# EAGLE board XRP_Controller-Panel (EAGLE 9.6.2), part 1 of 5
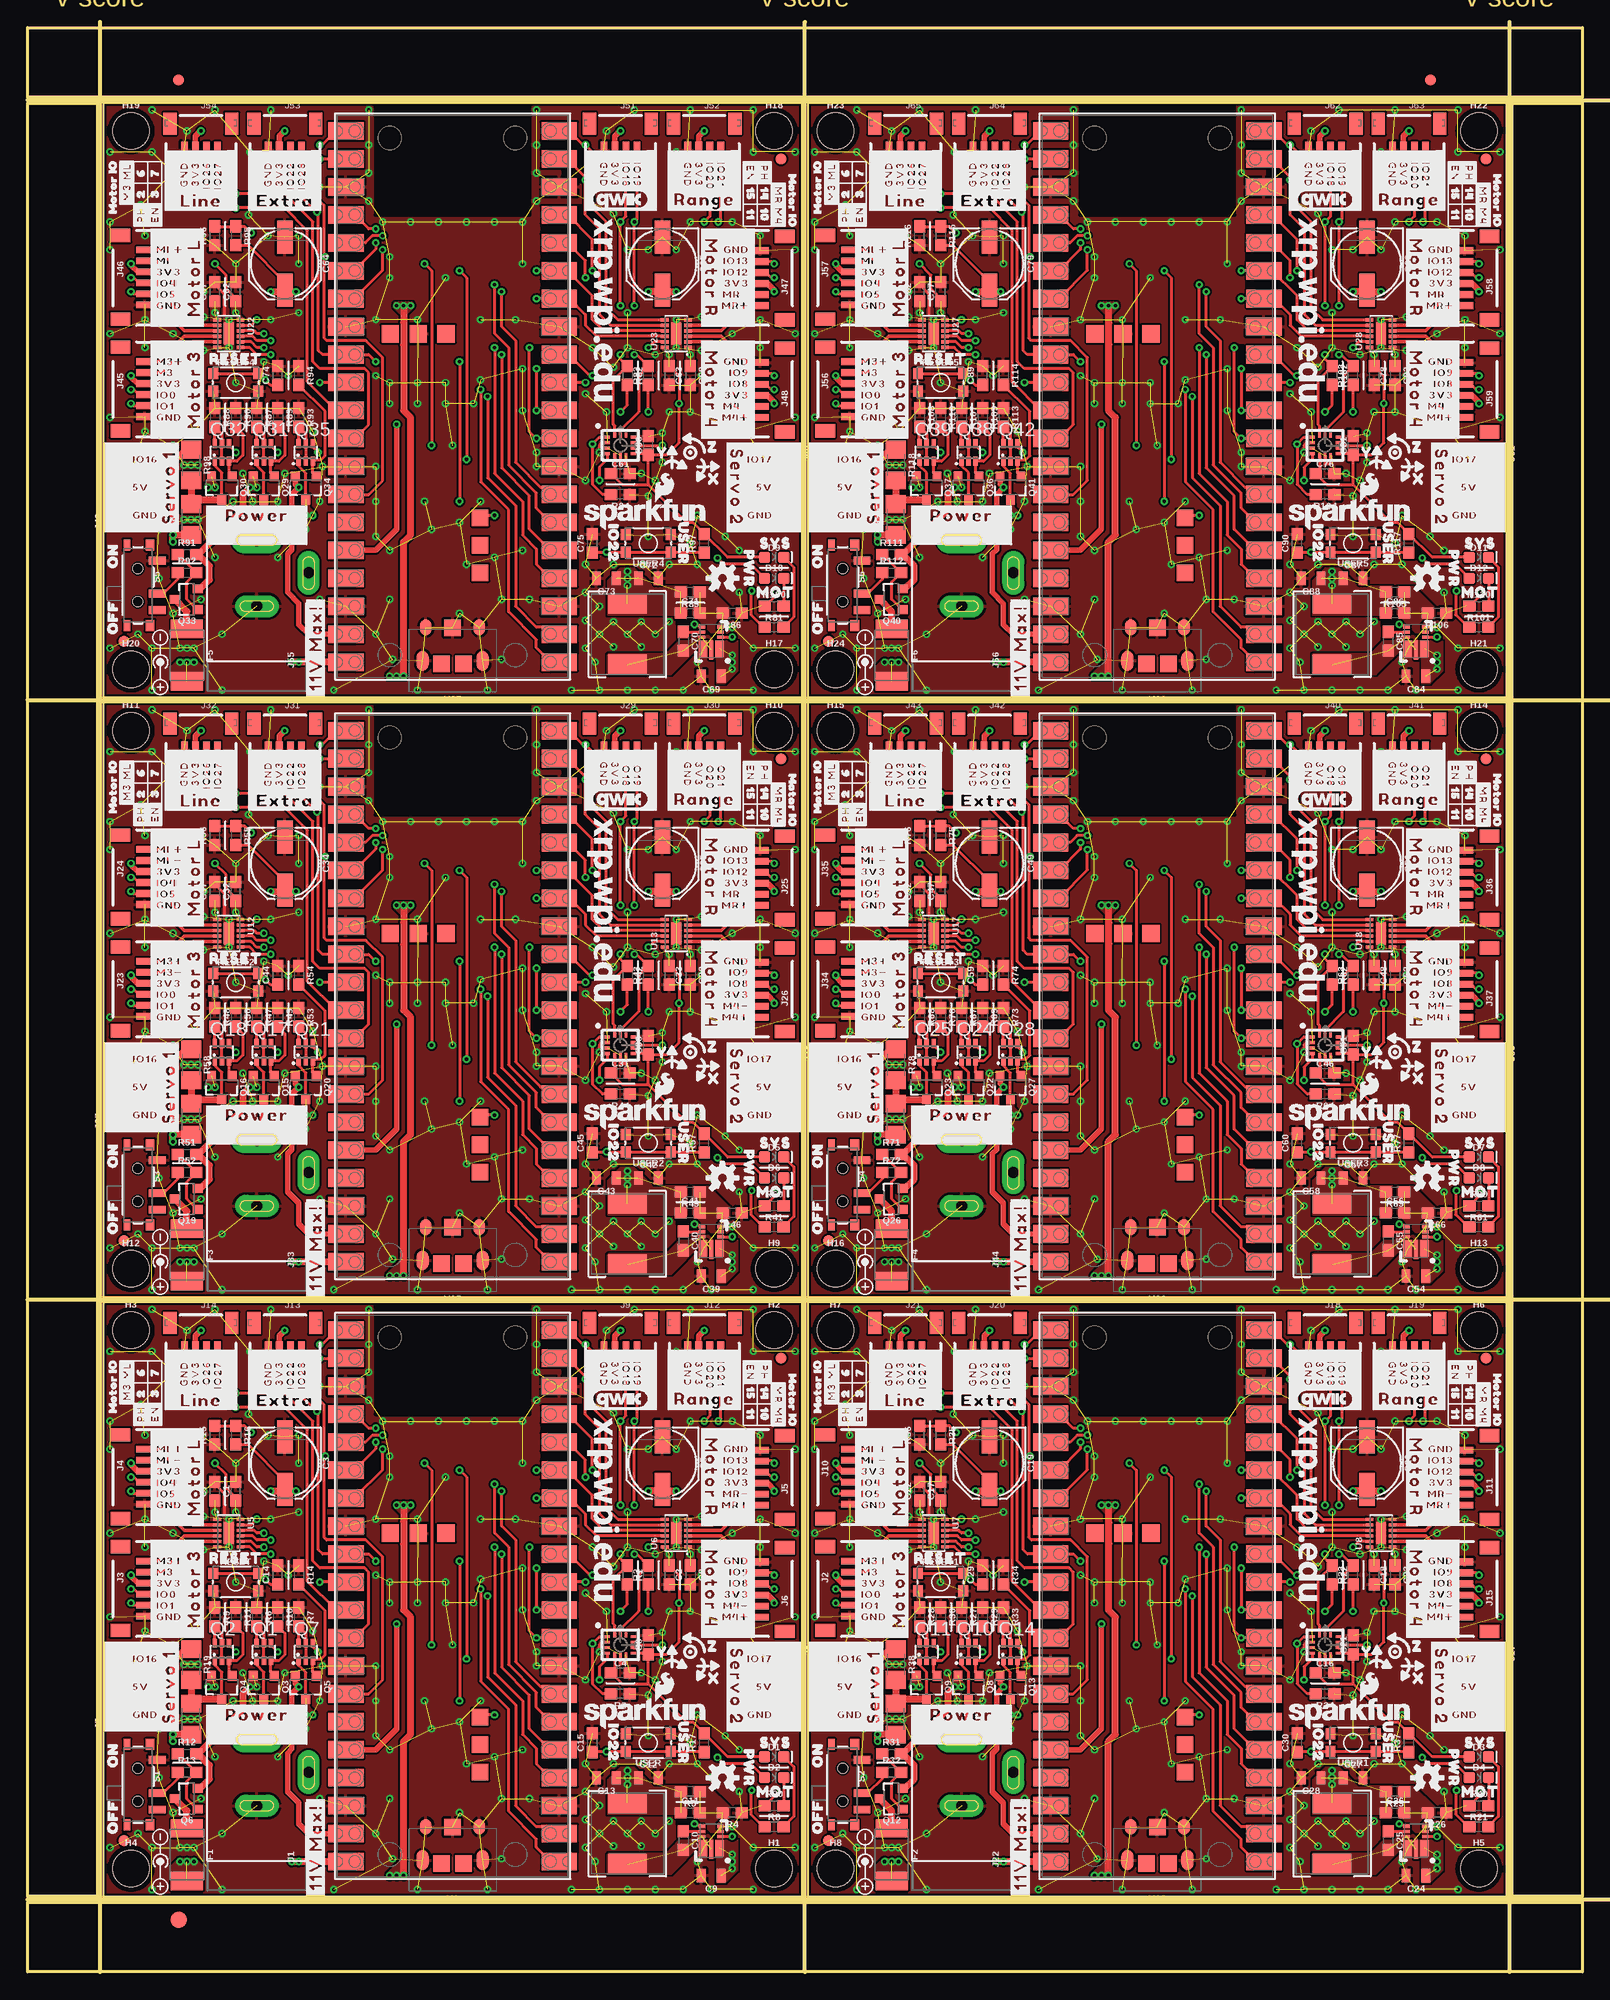
[diagram p0: board, top side]
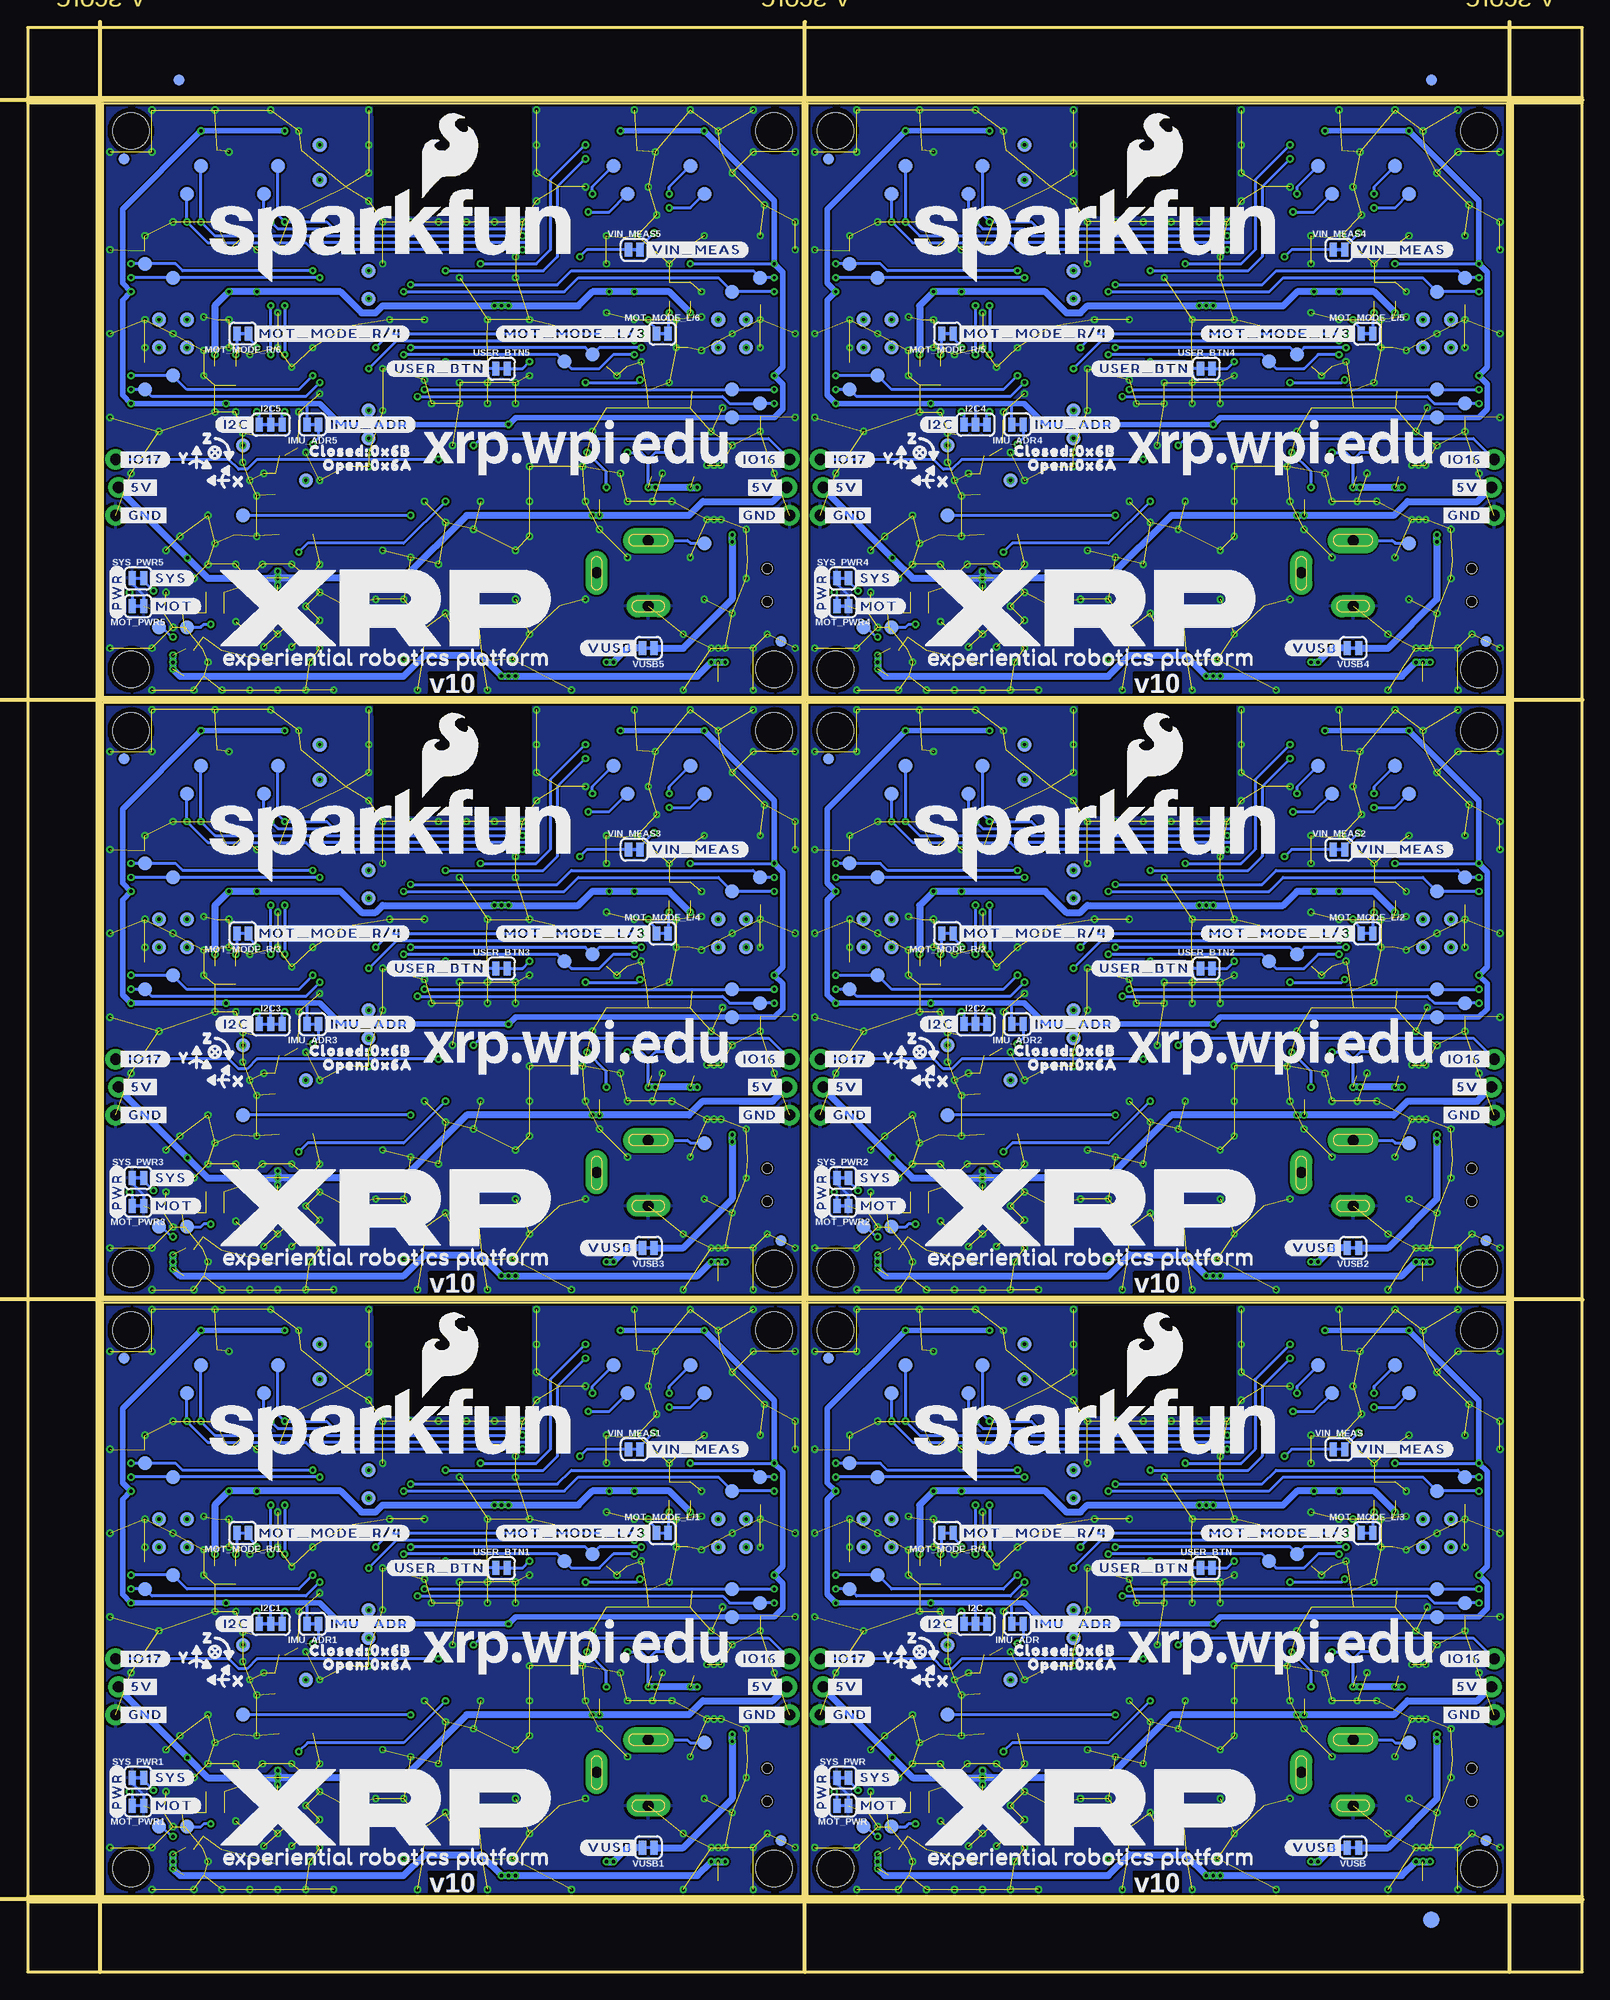
[diagram p1: board, bottom side, seen from below]

Size 141.22 x 176.66 mm. Coordinates in mm from the lower left corner, seen from the top.
Outline: 6.86,6.86 70.36,6.86 70.36,60.83 6.86,60.83 6.86,6.86
Outline: 70.87,6.86 134.37,6.86 134.37,60.83 70.87,60.83 70.87,6.86
Outline: 6.86,61.34 70.36,61.34 70.36,115.32 6.86,115.32 6.86,61.34
Outline: 70.87,61.34 134.37,61.34 134.37,115.32 70.87,115.32 70.87,61.34
Outline: 6.86,115.82 70.36,115.82 70.36,169.8 6.86,169.8 6.86,115.82
Outline: 70.87,115.82 134.37,115.82 134.37,169.8 70.87,169.8 70.87,115.82
Outline: 0,6.35 141.22,6.35 141.22,0 0,0 0,6.35
Outline: 134.87,169.8 141.22,169.8 141.22,6.86 134.87,6.86 134.87,169.8
Outline: 0,176.66 141.22,176.66 141.22,170.31 0,170.31 0,176.66
Outline: 0,169.8 6.35,169.8 6.35,6.86 0,6.86 0,169.8
Copper layers (1*16): Top 0.035mm / dielectric 1.5mm / Bottom 0.035mm
Design rules "XRP_Controller": minimum track width 7mil, minimum drill 0.3mm, track to track 7mil, track to pad 6mil, pad to pad 7mil, via to via 7mil, smd to smd 7mil, copper to edge 7mil, drill to drill 7mil, minimum pad ring 7mil, minimum via ring 7mil, stop-mask expansion 3mil, vias tented up to drill 25mil, thermal gap 10mil
tRestrict: area 31.6,59.7 to 45.6,60.8; area 49.7,18.7 to 49.9,19.2; area 49.7,21.2 to 49.9,21.7; area 49.7,23.7 to 49.9,24.3; area 49.7,11 to 49.9,11.6; area 49.7,31.4 to 49.9,31.9; area 49.7,33.9 to 49.9,34.4; area 46.7,44.1 to 47,44.6; area 46.7,46.6 to 47,47.1; area 46.7,49.1 to 47,49.7; area 46.7,56.8 to 47,57.3; area 50,51.3 to 50.3,51.4; 102 more areas
bRestrict: area 31.6,59.7 to 45.6,60.8; area 95.6,59.7 to 109.6,60.8; area 31.6,114.1 to 45.6,115.3; area 95.6,114.1 to 109.6,115.3; area 31.6,168.6 to 45.6,169.8; area 95.6,168.6 to 109.6,169.8
Milling: 7 lines

## Footprints (pad centres in the part's own frame; a part is rotated, then mirrored left to right if it is on the bottom)
0603 = smd 1.1 x 1: 1 -0.85,0; 2 0.85,0
PANASONIC_D = smd 3 x 1.4: + 2.4,0; - -2.4,0
0805 = smd 0.8 x 1.2: 1 -0.9,0; 2 0.9,0
LED-0603 = smd 1 x 1: A -0.877,0; C 0.877,0
FIDUCIAL-1X2 = smd 1 x 1: 1 0,0
FIDUCIAL-1.5X3 = smd 1.5 x 1.5: 1 0,0
1812 = smd 1.676 x 2.896: 1 -2.388,0; 2 2.388,0
STAND-OFF = hole 3.302: 0,0
SMT-JUMPER_3_2-NC_TRACE_SILK = smd 0.66 x 1.27: 1 -1.041,0; 2 0,0; 3 1.041,0
SMT-JUMPER_2_NC_TRACE_SILK = smd 0.66 x 1.27: 1 -0.521,0; 2 0.521,0
POWER_JACK_PTH_SLOT = drill 1 pad 2 long: GND 0,0; GNDBREAK -3.048,4.699 | drill 1 pad 2.3 long: PWR -5.969,0
JST-6-SMD-VERT-1.0MM = smd 0.6 x 1.55: 1 -2.54,1.27; 2 -1.54,1.27; 3 -0.54,1.27; 4 0.46,1.27; 5 1.46,1.27; 6 2.46,1.27 | smd 1.2 x 1.8: P$1 -3.84,-0.955; P$2 3.76,-0.955
1X03_LOCK_NO_SILK = drill 1.016 pad 1.88: 1 0,0.127; 2 2.54,-0.127; 3 5.08,0.127
JST04_1MM_VERT = smd 0.6 x 1.55: 1 -1.5,0.775; 2 -0.5,0.775; 3 0.5,0.775; 4 1.5,0.775 | smd 1.2 x 2: NC1 -2.8,3.2; NC2 2.8,3.2
07A7_6U8H = smd 1.85 x 3.5: P$1 -2.775,0; P$2 2.775,0
SOT363_PHILIPS = smd 0.4 x 0.8: 1 -0.65,-0.8; 2 0,-0.8; 3 0.65,-0.8; 4 0.65,0.8; 5 0,0.8; 6 -0.65,0.8
SOT23-3 = smd 0.8 x 0.9: 1 -0.95,-1; 2 0.95,-1; 3 0,1.1
1206 = smd 1.6 x 1.8: 1 -1.4,0; 2 1.4,0
TACTILE_SWITCH_SMD_4.6X2.8MM = smd 0.9 x 1: 1 -2.05,-0.8; 2 2.05,-0.8; 3 2.05,0.8; 4 -2.05,0.8
SWITCH_SPST_SMD_A = smd 0.7 x 1.5: 1 -2.25,-1.75; 2 -0.75,-1.75; 3 2.25,-1.75 | smd 1 x 0.6: GND1 -3.65,1; GND3 3.65,1 | smd 1 x 0.8: GND2 -3.65,-1.1; GND4 3.65,-1.1 | hole 0.9: -1.5,0; 1.5,0
PAD.03X.05 = smd 1.27 x 1.27: 1 0,0
RPI_PICO_W = smd 3.2 x 1.6: 1 -9.69,24.13; 2 -9.69,21.59; 3 -9.69,19.05; 4 -9.69,16.51; 5 -9.69,13.97; 6 -9.69,11.43; 7 -9.69,8.89; 8 -9.69,6.35; 9 -9.69,3.81; 10 -9.69,1.27; 11 -9.69,-1.27; 12 -9.69,-3.81; 13 -9.69,-6.35; 14 -9.69,-8.89; 15 -9.69,-11.43; 16 -9.69,-13.97; 17 -9.69,-16.51; 18 -9.69,-19.05; 19 -9.69,-21.59; 20 -9.69,-24.13; 21 9.69,-24.13; 22 9.69,-21.59; 23 9.69,-19.05; 24 9.69,-16.51; 25 9.69,-13.97; 26 9.69,-11.43; 27 9.69,-8.89; 28 9.69,-6.35; 29 9.69,-3.81; 30 9.69,-1.27; 31 9.69,1.27; 32 9.69,3.81; 33 9.69,6.35; 34 9.69,8.89; 35 9.69,11.43; 36 9.69,13.97; 37 9.69,16.51; 38 9.69,19.05; 39 9.69,21.59; 40 9.69,24.13 | smd 1.5 x 1.5: 41 0,21; 42 1,24.3; 43 -1,24.3; 44 -2.5,16; 45 -2.5,13.5; 46 -2.5,11 | smd 1.575 x 1.575: 47 0.584,-5.7; 48 3.124,-5.7; 49 5.664,-5.7 | smd 1.1 x 1.8: A -2.725,24; B 2.725,24 | smd 1.05 x 1.45: C -2.425,20.97; D 2.425,20.97
V-DFN3020-13 = smd 1.5 x 0.8: P$1 -0.675,-0.75; P$8 -0.675,0.75 | smd 0.3 x 0.6: P$2 0.375,-0.85; P$3 0.825,-0.85; P$4 1.275,-0.85; P$5 1.275,0.85; P$6 0.825,0.85; P$7 0.375,0.85 | smd 1.73 x 0.4: P$9 -0.79,0
LGA14L = smd 0.45 x 0.25: 1 -1.175,0.75; 2 -1.175,0.25; 3 -1.175,-0.25; 4 -1.175,-0.75; 8 1.175,-0.75; 9 1.175,-0.25; 10 1.175,0.25; 11 1.175,0.75 | smd 0.25 x 0.45: 5 -0.5,-0.925; 6 0,-0.925; 7 0.5,-0.925; 12 0.5,0.925; 13 0,0.925; 14 -0.5,0.925
WSON-12 = smd 0.3 x 0.7: 1 -1.25,-1.05; 2 -0.75,-1.05; 3 -0.25,-1.05; 4 0.25,-1.05; 5 0.75,-1.05; 6 1.25,-1.05; 7 1.25,1.05; 8 0.75,1.05; 9 0.25,1.05; 10 -0.25,1.05; 11 -0.75,1.05; 12 -1.25,1.05 | smd 2 x 0.9: PAD 0,0

## Placement (x,y rotation side)
C1  0.1uF  [0603]  18.92,43.69 90 top
C2  0.1uF  [0603]  58.29,36.07 270 top
C3  100uF  [PANASONIC_D]  23.37,46.23 270 top
C4  0.1uF  [0603]  53.85,27.18 0 top
C5  100uF  [PANASONIC_D]  57.66,46.23 270 top
C6  0.1uF  [0603]  56.39,29.72 90 top
C7  0.1uF  [0603]  17.02,43.69 90 top
C8  0.1uF  [0603]  60.2,36.07 270 top
C9  10uF  [0805]  62.1,8.76 180 top
C10  0.1uF  [0603]  59.56,11.94 270 top
C11  47pF  [0603]  60.2,14.48 0 top
C12  22uF  [0805]  56.39,17.65 0 top
C13  22uF  [0805]  52.58,17.65 180 top
C14  0.1uF  [0603]  22.73,36.07 90 top
C15  0.1uF  [0603]  51.31,20.83 90 top
C16  0.1uF  [0603]  117.86,27.18 0 top
C17  0.1uF  [0603]  82.93,43.69 90 top
C18  0.1uF  [0603]  122.3,36.07 270 top
C19  100uF  [PANASONIC_D]  87.38,46.23 270 top
C20  100uF  [PANASONIC_D]  121.67,46.23 270 top
C21  0.1uF  [0603]  120.4,29.72 90 top
C22  0.1uF  [0603]  81.03,43.69 90 top
C23  0.1uF  [0603]  124.21,36.07 270 top
C24  10uF  [0805]  126.11,8.76 180 top
C25  0.1uF  [0603]  123.57,11.94 270 top
C26  47pF  [0603]  124.21,14.48 0 top
C27  22uF  [0805]  120.4,17.65 0 top
C28  22uF  [0805]  116.59,17.65 180 top
C29  0.1uF  [0603]  86.74,36.07 90 top
C30  0.1uF  [0603]  115.32,20.83 90 top
C31  0.1uF  [0603]  53.85,81.66 0 top
C32  0.1uF  [0603]  18.92,98.17 90 top
C33  0.1uF  [0603]  58.29,90.55 270 top
C34  100uF  [PANASONIC_D]  23.37,100.71 270 top
C35  100uF  [PANASONIC_D]  57.66,100.71 270 top
C36  0.1uF  [0603]  56.39,84.2 90 top
C37  0.1uF  [0603]  17.02,98.17 90 top
C38  0.1uF  [0603]  60.2,90.55 270 top
C39  10uF  [0805]  62.1,63.25 180 top
C40  0.1uF  [0603]  59.56,66.42 270 top
C41  47pF  [0603]  60.2,68.96 0 top
C42  22uF  [0805]  56.39,72.14 0 top
C43  22uF  [0805]  52.58,72.14 180 top
C44  0.1uF  [0603]  22.73,90.55 90 top
C45  0.1uF  [0603]  51.31,75.31 90 top
C46  0.1uF  [0603]  117.86,81.66 0 top
C47  0.1uF  [0603]  82.93,98.17 90 top
C48  0.1uF  [0603]  122.3,90.55 270 top
C49  100uF  [PANASONIC_D]  87.38,100.71 270 top
C50  100uF  [PANASONIC_D]  121.67,100.71 270 top
C51  0.1uF  [0603]  120.4,84.2 90 top
C52  0.1uF  [0603]  81.03,98.17 90 top
C53  0.1uF  [0603]  124.21,90.55 270 top
C54  10uF  [0805]  126.11,63.25 180 top
C55  0.1uF  [0603]  123.57,66.42 270 top
C56  47pF  [0603]  124.21,68.96 0 top
C57  22uF  [0805]  120.4,72.14 0 top
C58  22uF  [0805]  116.59,72.14 180 top
C59  0.1uF  [0603]  86.74,90.55 90 top
C60  0.1uF  [0603]  115.32,75.31 90 top
C61  0.1uF  [0603]  53.85,136.14 0 top
C62  0.1uF  [0603]  18.92,152.65 90 top
C63  0.1uF  [0603]  58.29,145.03 270 top
C64  100uF  [PANASONIC_D]  23.37,155.19 270 top
C65  100uF  [PANASONIC_D]  57.66,155.19 270 top
C66  0.1uF  [0603]  56.39,138.68 90 top
C67  0.1uF  [0603]  17.02,152.65 90 top
C68  0.1uF  [0603]  60.2,145.03 270 top
C69  10uF  [0805]  62.1,117.73 180 top
C70  0.1uF  [0603]  59.56,120.9 270 top
C71  47pF  [0603]  60.2,123.44 0 top
C72  22uF  [0805]  56.39,126.62 0 top
C73  22uF  [0805]  52.58,126.62 180 top
C74  0.1uF  [0603]  22.73,145.03 90 top
C75  0.1uF  [0603]  51.31,129.79 90 top
C76  0.1uF  [0603]  117.86,136.14 0 top
C77  0.1uF  [0603]  82.93,152.65 90 top
C78  0.1uF  [0603]  122.3,145.03 270 top
C79  100uF  [PANASONIC_D]  87.38,155.19 270 top
C80  100uF  [PANASONIC_D]  121.67,155.19 270 top
C81  0.1uF  [0603]  120.4,138.68 90 top
C82  0.1uF  [0603]  81.03,152.65 90 top
C83  0.1uF  [0603]  124.21,145.03 270 top
C84  10uF  [0805]  126.11,117.73 180 top
C85  0.1uF  [0603]  123.57,120.9 270 top
C86  47pF  [0603]  124.21,123.44 0 top
C87  22uF  [0805]  120.4,126.62 0 top
C88  22uF  [0805]  116.59,126.62 180 top
C89  0.1uF  [0603]  86.74,145.03 90 top
C90  0.1uF  [0603]  115.32,129.79 90 top
D1  Red  [LED-0603]  67.82,19.56 0 top
D2  Red  [LED-0603]  67.82,17.65 0 top
D3  Red  [LED-0603]  131.83,19.56 0 top
D4  Red  [LED-0603]  131.83,17.65 0 top
D5  Red  [LED-0603]  67.82,74.04 0 top
D6  Red  [LED-0603]  67.82,72.14 0 top
D7  Red  [LED-0603]  131.83,74.04 0 top
D8  Red  [LED-0603]  131.83,72.14 0 top
D9  Red  [LED-0603]  67.82,128.52 0 top
D10  Red  [LED-0603]  67.82,126.62 0 top
D11  Red  [LED-0603]  131.83,128.52 0 top
D12  Red  [LED-0603]  131.83,126.62 0 top
E$1  [FIDUCIAL-1X2]  13.72,171.89 0 top
E$2  [FIDUCIAL-1X2]  13.72,171.89 0 bottom
E$3  [FIDUCIAL-1X2]  127.44,171.89 0 top
E$4  [FIDUCIAL-1X2]  127.44,171.89 0 bottom
E$5  [FIDUCIAL-1.5X3]  13.72,4.76 0 top
E$6  [FIDUCIAL-1.5X3]  13.72,4.76 0 bottom
F1  16V/2.5A(5A TRIP)  [1812]  14.48,10.67 270 top
F2  16V/2.5A(5A TRIP)  [1812]  78.49,10.67 270 top
F3  16V/2.5A(5A TRIP)  [1812]  14.48,65.15 270 top
F4  16V/2.5A(5A TRIP)  [1812]  78.49,65.15 270 top
F5  16V/2.5A(5A TRIP)  [1812]  14.48,119.63 270 top
F6  16V/2.5A(5A TRIP)  [1812]  78.49,119.63 270 top
FD1  FIDUCIAL1X2  [FIDUCIAL-1X2]  68.45,55.75 0 top
FD2  FIDUCIAL1X2  [FIDUCIAL-1X2]  68.45,55.75 0 bottom
FD3  FIDUCIAL1X2  [FIDUCIAL-1X2]  8.76,11.94 0 top
FD4  FIDUCIAL1X2  [FIDUCIAL-1X2]  8.76,11.94 0 bottom
FD5  FIDUCIAL1X2  [FIDUCIAL-1X2]  132.46,55.75 0 top
FD6  FIDUCIAL1X2  [FIDUCIAL-1X2]  132.46,55.75 0 bottom
FD7  FIDUCIAL1X2  [FIDUCIAL-1X2]  72.77,11.94 0 top
FD8  FIDUCIAL1X2  [FIDUCIAL-1X2]  72.77,11.94 0 bottom
FD9  FIDUCIAL1X2  [FIDUCIAL-1X2]  68.45,110.24 0 top
FD10  FIDUCIAL1X2  [FIDUCIAL-1X2]  68.45,110.24 0 bottom
FD11  FIDUCIAL1X2  [FIDUCIAL-1X2]  8.76,66.42 0 top
FD12  FIDUCIAL1X2  [FIDUCIAL-1X2]  8.76,66.42 0 bottom
FD13  FIDUCIAL1X2  [FIDUCIAL-1X2]  132.46,110.24 0 top
FD14  FIDUCIAL1X2  [FIDUCIAL-1X2]  132.46,110.24 0 bottom
FD15  FIDUCIAL1X2  [FIDUCIAL-1X2]  72.77,66.42 0 top
FD16  FIDUCIAL1X2  [FIDUCIAL-1X2]  72.77,66.42 0 bottom
FD17  FIDUCIAL1X2  [FIDUCIAL-1X2]  68.45,164.72 0 top
FD18  FIDUCIAL1X2  [FIDUCIAL-1X2]  68.45,164.72 0 bottom
FD19  FIDUCIAL1X2  [FIDUCIAL-1X2]  8.76,120.9 0 top
FD20  FIDUCIAL1X2  [FIDUCIAL-1X2]  8.76,120.9 0 bottom
FD21  FIDUCIAL1X2  [FIDUCIAL-1X2]  132.46,164.72 0 top
FD22  FIDUCIAL1X2  [FIDUCIAL-1X2]  132.46,164.72 0 bottom
FD23  FIDUCIAL1X2  [FIDUCIAL-1X2]  72.77,120.9 0 top
FD24  FIDUCIAL1X2  [FIDUCIAL-1X2]  72.77,120.9 0 bottom
H1  STAND-OFF  [STAND-OFF]  67.82,9.4 0 top
H2  STAND-OFF  [STAND-OFF]  67.82,58.29 0 top
H3  STAND-OFF  [STAND-OFF]  9.4,58.29 0 top
H4  STAND-OFF  [STAND-OFF]  9.4,9.4 0 top
H5  STAND-OFF  [STAND-OFF]  131.83,9.4 0 top
H6  STAND-OFF  [STAND-OFF]  131.83,58.29 0 top
H7  STAND-OFF  [STAND-OFF]  73.41,58.29 0 top
H8  STAND-OFF  [STAND-OFF]  73.41,9.4 0 top
H9  STAND-OFF  [STAND-OFF]  67.82,63.88 0 top
H10  STAND-OFF  [STAND-OFF]  67.82,112.78 0 top
H11  STAND-OFF  [STAND-OFF]  9.4,112.78 0 top
H12  STAND-OFF  [STAND-OFF]  9.4,63.88 0 top
H13  STAND-OFF  [STAND-OFF]  131.83,63.88 0 top
H14  STAND-OFF  [STAND-OFF]  131.83,112.78 0 top
H15  STAND-OFF  [STAND-OFF]  73.41,112.78 0 top
H16  STAND-OFF  [STAND-OFF]  73.41,63.88 0 top
H17  STAND-OFF  [STAND-OFF]  67.82,118.36 0 top
H18  STAND-OFF  [STAND-OFF]  67.82,167.26 0 top
H19  STAND-OFF  [STAND-OFF]  9.4,167.26 0 top
H20  STAND-OFF  [STAND-OFF]  9.4,118.36 0 top
H21  STAND-OFF  [STAND-OFF]  131.83,118.36 0 top
H22  STAND-OFF  [STAND-OFF]  131.83,167.26 0 top
H23  STAND-OFF  [STAND-OFF]  73.41,167.26 0 top
H24  STAND-OFF  [STAND-OFF]  73.41,118.36 0 top
I2C  JUMPER-SMT_3_2-NC_TRACE_SILK  [SMT-JUMPER_3_2-NC_TRACE_SILK]  55.12,31.62 0 bottom
I2C1  JUMPER-SMT_3_2-NC_TRACE_SILK  [SMT-JUMPER_3_2-NC_TRACE_SILK]  119.13,31.62 0 bottom
I2C2  JUMPER-SMT_3_2-NC_TRACE_SILK  [SMT-JUMPER_3_2-NC_TRACE_SILK]  55.12,86.11 0 bottom
I2C3  JUMPER-SMT_3_2-NC_TRACE_SILK  [SMT-JUMPER_3_2-NC_TRACE_SILK]  119.13,86.11 0 bottom
I2C4  JUMPER-SMT_3_2-NC_TRACE_SILK  [SMT-JUMPER_3_2-NC_TRACE_SILK]  55.12,140.59 0 bottom
I2C5  JUMPER-SMT_3_2-NC_TRACE_SILK  [SMT-JUMPER_3_2-NC_TRACE_SILK]  119.13,140.59 0 bottom
IMU_ADR  JUMPER-SMT_2_NC_TRACE_SILK  [SMT-JUMPER_2_NC_TRACE_SILK]  51.31,31.62 180 bottom
IMU_ADR1  JUMPER-SMT_2_NC_TRACE_SILK  [SMT-JUMPER_2_NC_TRACE_SILK]  115.32,31.62 180 bottom
IMU_ADR2  JUMPER-SMT_2_NC_TRACE_SILK  [SMT-JUMPER_2_NC_TRACE_SILK]  51.31,86.11 180 bottom
IMU_ADR3  JUMPER-SMT_2_NC_TRACE_SILK  [SMT-JUMPER_2_NC_TRACE_SILK]  115.32,86.11 180 bottom
IMU_ADR4  JUMPER-SMT_2_NC_TRACE_SILK  [SMT-JUMPER_2_NC_TRACE_SILK]  51.31,140.59 180 bottom
IMU_ADR5  JUMPER-SMT_2_NC_TRACE_SILK  [SMT-JUMPER_2_NC_TRACE_SILK]  115.32,140.59 180 bottom
J1  POWER_JACKPOWER_JACK_SLOT  [POWER_JACK_PTH_SLOT]  20.83,15.11 270 top
J2  JST_6_PIN_VERTICAL  [JST-6-SMD-VERT-1.0MM]  73.41,34.8 270 top
J3  JST_6_PIN_VERTICAL  [JST-6-SMD-VERT-1.0MM]  9.4,34.8 270 top
J4  JST_6_PIN_VERTICAL  [JST-6-SMD-VERT-1.0MM]  9.4,44.96 270 top
J5  JST_6_PIN_VERTICAL  [JST-6-SMD-VERT-1.0MM]  67.82,44.96 90 top
J6  JST_6_PIN_VERTICAL  [JST-6-SMD-VERT-1.0MM]  67.82,34.8 90 top
J7  [1X03_LOCK_NO_SILK]  8.13,23.37 90 top
J8  [1X03_LOCK_NO_SILK]  69.09,28.45 270 top
J9  Vertical Qwiic Connector  [JST04_1MM_VERT]  53.85,55.75 0 top
J10  JST_6_PIN_VERTICAL  [JST-6-SMD-VERT-1.0MM]  73.41,44.96 270 top
J11  JST_6_PIN_VERTICAL  [JST-6-SMD-VERT-1.0MM]  131.83,44.96 90 top
J12  Vertical Qwiic Connector  [JST04_1MM_VERT]  61.47,55.75 0 top
J13  Vertical Qwiic Connector  [JST04_1MM_VERT]  23.37,55.75 0 top
J14  Vertical Qwiic Connector  [JST04_1MM_VERT]  15.75,55.75 0 top
J15  JST_6_PIN_VERTICAL  [JST-6-SMD-VERT-1.0MM]  131.83,34.8 90 top
J16  [1X03_LOCK_NO_SILK]  72.14,23.37 90 top
J17  [1X03_LOCK_NO_SILK]  133.1,28.45 270 top
J18  Vertical Qwiic Connector  [JST04_1MM_VERT]  117.86,55.75 0 top
J19  Vertical Qwiic Connector  [JST04_1MM_VERT]  125.48,55.75 0 top
J20  Vertical Qwiic Connector  [JST04_1MM_VERT]  87.38,55.75 0 top
J21  Vertical Qwiic Connector  [JST04_1MM_VERT]  79.76,55.75 0 top
J22  POWER_JACKPOWER_JACK_SLOT  [POWER_JACK_PTH_SLOT]  84.84,15.11 270 top
J23  JST_6_PIN_VERTICAL  [JST-6-SMD-VERT-1.0MM]  9.4,89.28 270 top
J24  JST_6_PIN_VERTICAL  [JST-6-SMD-VERT-1.0MM]  9.4,99.44 270 top
J25  JST_6_PIN_VERTICAL  [JST-6-SMD-VERT-1.0MM]  67.82,99.44 90 top
J26  JST_6_PIN_VERTICAL  [JST-6-SMD-VERT-1.0MM]  67.82,89.28 90 top
J27  [1X03_LOCK_NO_SILK]  8.13,77.85 90 top
J28  [1X03_LOCK_NO_SILK]  69.09,82.93 270 top
J29  Vertical Qwiic Connector  [JST04_1MM_VERT]  53.85,110.24 0 top
J30  Vertical Qwiic Connector  [JST04_1MM_VERT]  61.47,110.24 0 top
J31  Vertical Qwiic Connector  [JST04_1MM_VERT]  23.37,110.24 0 top
J32  Vertical Qwiic Connector  [JST04_1MM_VERT]  15.75,110.24 0 top
J33  POWER_JACKPOWER_JACK_SLOT  [POWER_JACK_PTH_SLOT]  20.83,69.6 270 top
J34  JST_6_PIN_VERTICAL  [JST-6-SMD-VERT-1.0MM]  73.41,89.28 270 top
J35  JST_6_PIN_VERTICAL  [JST-6-SMD-VERT-1.0MM]  73.41,99.44 270 top
J36  JST_6_PIN_VERTICAL  [JST-6-SMD-VERT-1.0MM]  131.83,99.44 90 top
J37  JST_6_PIN_VERTICAL  [JST-6-SMD-VERT-1.0MM]  131.83,89.28 90 top
J38  [1X03_LOCK_NO_SILK]  72.14,77.85 90 top
J39  [1X03_LOCK_NO_SILK]  133.1,82.93 270 top
J40  Vertical Qwiic Connector  [JST04_1MM_VERT]  117.86,110.24 0 top
J41  Vertical Qwiic Connector  [JST04_1MM_VERT]  125.48,110.24 0 top
J42  Vertical Qwiic Connector  [JST04_1MM_VERT]  87.38,110.24 0 top
J43  Vertical Qwiic Connector  [JST04_1MM_VERT]  79.76,110.24 0 top
J44  POWER_JACKPOWER_JACK_SLOT  [POWER_JACK_PTH_SLOT]  84.84,69.6 270 top
J45  JST_6_PIN_VERTICAL  [JST-6-SMD-VERT-1.0MM]  9.4,143.76 270 top
J46  JST_6_PIN_VERTICAL  [JST-6-SMD-VERT-1.0MM]  9.4,153.92 270 top
J47  JST_6_PIN_VERTICAL  [JST-6-SMD-VERT-1.0MM]  67.82,153.92 90 top
J48  JST_6_PIN_VERTICAL  [JST-6-SMD-VERT-1.0MM]  67.82,143.76 90 top
J49  [1X03_LOCK_NO_SILK]  8.13,132.33 90 top
J50  [1X03_LOCK_NO_SILK]  69.09,137.41 270 top
J51  Vertical Qwiic Connector  [JST04_1MM_VERT]  53.85,164.72 0 top
J52  Vertical Qwiic Connector  [JST04_1MM_VERT]  61.47,164.72 0 top
J53  Vertical Qwiic Connector  [JST04_1MM_VERT]  23.37,164.72 0 top
J54  Vertical Qwiic Connector  [JST04_1MM_VERT]  15.75,164.72 0 top
J55  POWER_JACKPOWER_JACK_SLOT  [POWER_JACK_PTH_SLOT]  20.83,124.08 270 top
J56  JST_6_PIN_VERTICAL  [JST-6-SMD-VERT-1.0MM]  73.41,143.76 270 top
J57  JST_6_PIN_VERTICAL  [JST-6-SMD-VERT-1.0MM]  73.41,153.92 270 top
J58  JST_6_PIN_VERTICAL  [JST-6-SMD-VERT-1.0MM]  131.83,153.92 90 top
J59  JST_6_PIN_VERTICAL  [JST-6-SMD-VERT-1.0MM]  131.83,143.76 90 top
J60  [1X03_LOCK_NO_SILK]  72.14,132.33 90 top
J61  [1X03_LOCK_NO_SILK]  133.1,137.41 270 top
J62  Vertical Qwiic Connector  [JST04_1MM_VERT]  117.86,164.72 0 top
J63  Vertical Qwiic Connector  [JST04_1MM_VERT]  125.48,164.72 0 top
J64  Vertical Qwiic Connector  [JST04_1MM_VERT]  87.38,164.72 0 top
J65  Vertical Qwiic Connector  [JST04_1MM_VERT]  79.76,164.72 0 top
J66  POWER_JACKPOWER_JACK_SLOT  [POWER_JACK_PTH_SLOT]  84.84,124.08 270 top
L1  6.8UH  [07A7_6U8H]  54.48,12.57 90 top
L2  6.8UH  [07A7_6U8H]  118.49,12.57 90 top
L3  6.8UH  [07A7_6U8H]  54.48,67.06 90 top
L4  6.8UH  [07A7_6U8H]  118.49,67.06 90 top
L5  6.8UH  [07A7_6U8H]  54.48,121.54 90 top
L6  6.8UH  [07A7_6U8H]  118.49,121.54 90 top
LOGO1  OSHW-LOGOS  [OSHW-LOGO-S]  63.12,17.65 0 top
LOGO2  OSHW-LOGOS  [OSHW-LOGO-S]  127.13,17.65 0 top
LOGO3  SFE_LOGO_NAME_FLAME.3_INCH  [SFE_LOGO_NAME_FLAME_.3]  44.32,48.77 0 bottom
LOGO4  SFE_LOGO_NAME_FLAME.1_INCH  [SFE_LOGO_NAME_FLAME_.1]  56.13,23.5 0 top
LOGO5  SFE_LOGO_NAME_FLAME.3_INCH  [SFE_LOGO_NAME_FLAME_.3]  108.33,48.77 0 bottom
LOGO6  SFE_LOGO_NAME_FLAME.1_INCH  [SFE_LOGO_NAME_FLAME_.1]  120.14,23.5 0 top
LOGO7  OSHW-LOGOS  [OSHW-LOGO-S]  63.12,72.14 0 top
LOGO8  SFE_LOGO_NAME_FLAME.3_INCH  [SFE_LOGO_NAME_FLAME_.3]  44.32,103.25 0 bottom
LOGO9  SFE_LOGO_NAME_FLAME.1_INCH  [SFE_LOGO_NAME_FLAME_.1]  56.13,77.98 0 top
LOGO10  OSHW-LOGOS  [OSHW-LOGO-S]  127.13,72.14 0 top
LOGO11  SFE_LOGO_NAME_FLAME.3_INCH  [SFE_LOGO_NAME_FLAME_.3]  108.33,103.25 0 bottom
LOGO12  SFE_LOGO_NAME_FLAME.1_INCH  [SFE_LOGO_NAME_FLAME_.1]  120.14,77.98 0 top
LOGO13  OSHW-LOGOS  [OSHW-LOGO-S]  63.12,126.62 0 top
LOGO14  SFE_LOGO_NAME_FLAME.3_INCH  [SFE_LOGO_NAME_FLAME_.3]  44.32,157.73 0 bottom
LOGO15  SFE_LOGO_NAME_FLAME.1_INCH  [SFE_LOGO_NAME_FLAME_.1]  56.13,132.46 0 top
LOGO16  OSHW-LOGOS  [OSHW-LOGO-S]  127.13,126.62 0 top
LOGO17  SFE_LOGO_NAME_FLAME.3_INCH  [SFE_LOGO_NAME_FLAME_.3]  108.33,157.73 0 bottom
LOGO18  SFE_LOGO_NAME_FLAME.1_INCH  [SFE_LOGO_NAME_FLAME_.1]  120.14,132.46 0 top
MOT_MODE_L/1  JUMPER-SMT_2_NC_TRACE_SILK  [SMT-JUMPER_2_NC_TRACE_SILK]  83.57,39.88 0 bottom
MOT_MODE_L/2  JUMPER-SMT_2_NC_TRACE_SILK  [SMT-JUMPER_2_NC_TRACE_SILK]  19.56,94.36 0 bottom
MOT_MODE_L/3  JUMPER-SMT_2_NC_TRACE_SILK  [SMT-JUMPER_2_NC_TRACE_SILK]  19.56,39.88 0 bottom
MOT_MODE_L/4  JUMPER-SMT_2_NC_TRACE_SILK  [SMT-JUMPER_2_NC_TRACE_SILK]  83.57,94.36 0 bottom
MOT_MODE_L/5  JUMPER-SMT_2_NC_TRACE_SILK  [SMT-JUMPER_2_NC_TRACE_SILK]  19.56,148.84 0 bottom
MOT_MODE_L/6  JUMPER-SMT_2_NC_TRACE_SILK  [SMT-JUMPER_2_NC_TRACE_SILK]  83.57,148.84 0 bottom
MOT_MODE_R/1  JUMPER-SMT_2_NC_TRACE_SILK  [SMT-JUMPER_2_NC_TRACE_SILK]  121.67,39.88 180 bottom
MOT_MODE_R/2  JUMPER-SMT_2_NC_TRACE_SILK  [SMT-JUMPER_2_NC_TRACE_SILK]  57.66,94.36 180 bottom
MOT_MODE_R/3  JUMPER-SMT_2_NC_TRACE_SILK  [SMT-JUMPER_2_NC_TRACE_SILK]  121.67,94.36 180 bottom
MOT_MODE_R/4  JUMPER-SMT_2_NC_TRACE_SILK  [SMT-JUMPER_2_NC_TRACE_SILK]  57.66,39.88 180 bottom
MOT_MODE_R/5  JUMPER-SMT_2_NC_TRACE_SILK  [SMT-JUMPER_2_NC_TRACE_SILK]  57.66,148.84 180 bottom
MOT_MODE_R/6  JUMPER-SMT_2_NC_TRACE_SILK  [SMT-JUMPER_2_NC_TRACE_SILK]  121.67,148.84 180 bottom
MOT_PWR  JUMPER-SMT_2_NC_TRACE_SILK  [SMT-JUMPER_2_NC_TRACE_SILK]  67.18,15.11 180 bottom
MOT_PWR1  JUMPER-SMT_2_NC_TRACE_SILK  [SMT-JUMPER_2_NC_TRACE_SILK]  131.19,15.11 180 bottom
MOT_PWR2  JUMPER-SMT_2_NC_TRACE_SILK  [SMT-JUMPER_2_NC_TRACE_SILK]  67.18,69.6 180 bottom
MOT_PWR3  JUMPER-SMT_2_NC_TRACE_SILK  [SMT-JUMPER_2_NC_TRACE_SILK]  131.19,69.6 180 bottom
MOT_PWR4  JUMPER-SMT_2_NC_TRACE_SILK  [SMT-JUMPER_2_NC_TRACE_SILK]  67.18,124.08 180 bottom
MOT_PWR5  JUMPER-SMT_2_NC_TRACE_SILK  [SMT-JUMPER_2_NC_TRACE_SILK]  131.19,124.08 180 bottom
Q1  [SOT363_PHILIPS]  21.46,29.08 0 top
Q2  [SOT363_PHILIPS]  17.65,29.08 0 top
Q3  20V/4.2A/52mΩ/1.4W  [SOT23-3]  21.46,25.91 180 top
Q4  20V/4.2A/52mΩ/1.4W  [SOT23-3]  17.65,25.91 180 top
Q5  20V/4.2A/52mΩ/1.4W  [SOT23-3]  25.27,25.91 180 top
Q6  20V/4.2A/52mΩ/1.4W  [SOT23-3]  14.48,15.75 90 top
Q7  [SOT363_PHILIPS]  25.27,29.08 0 top
Q8  20V/4.2A/52mΩ/1.4W  [SOT23-3]  85.47,25.91 180 top
Q9  20V/4.2A/52mΩ/1.4W  [SOT23-3]  81.66,25.91 180 top
Q10  [SOT363_PHILIPS]  85.47,29.08 0 top
Q11  [SOT363_PHILIPS]  81.66,29.08 0 top
Q12  20V/4.2A/52mΩ/1.4W  [SOT23-3]  78.49,15.75 90 top
Q13  20V/4.2A/52mΩ/1.4W  [SOT23-3]  89.28,25.91 180 top
Q14  [SOT363_PHILIPS]  89.28,29.08 0 top
Q15  20V/4.2A/52mΩ/1.4W  [SOT23-3]  21.46,80.39 180 top
Q16  20V/4.2A/52mΩ/1.4W  [SOT23-3]  17.65,80.39 180 top
Q17  [SOT363_PHILIPS]  21.46,83.57 0 top
Q18  [SOT363_PHILIPS]  17.65,83.57 0 top
Q19  20V/4.2A/52mΩ/1.4W  [SOT23-3]  14.48,70.23 90 top
Q20  20V/4.2A/52mΩ/1.4W  [SOT23-3]  25.27,80.39 180 top
Q21  [SOT363_PHILIPS]  25.27,83.57 0 top
Q22  20V/4.2A/52mΩ/1.4W  [SOT23-3]  85.47,80.39 180 top
Q23  20V/4.2A/52mΩ/1.4W  [SOT23-3]  81.66,80.39 180 top
Q24  [SOT363_PHILIPS]  85.47,83.57 0 top
Q25  [SOT363_PHILIPS]  81.66,83.57 0 top
Q26  20V/4.2A/52mΩ/1.4W  [SOT23-3]  78.49,70.23 90 top
Q27  20V/4.2A/52mΩ/1.4W  [SOT23-3]  89.28,80.39 180 top
Q28  [SOT363_PHILIPS]  89.28,83.57 0 top
Q29  20V/4.2A/52mΩ/1.4W  [SOT23-3]  21.46,134.87 180 top
Q30  20V/4.2A/52mΩ/1.4W  [SOT23-3]  17.65,134.87 180 top
Q31  [SOT363_PHILIPS]  21.46,138.05 0 top
Q32  [SOT363_PHILIPS]  17.65,138.05 0 top
Q33  20V/4.2A/52mΩ/1.4W  [SOT23-3]  14.48,124.71 90 top
Q34  20V/4.2A/52mΩ/1.4W  [SOT23-3]  25.27,134.87 180 top
Q35  [SOT363_PHILIPS]  25.27,138.05 0 top
Q36  20V/4.2A/52mΩ/1.4W  [SOT23-3]  85.47,134.87 180 top
Q37  20V/4.2A/52mΩ/1.4W  [SOT23-3]  81.66,134.87 180 top
Q38  [SOT363_PHILIPS]  85.47,138.05 0 top
Q39  [SOT363_PHILIPS]  81.66,138.05 0 top
Q40  20V/4.2A/52mΩ/1.4W  [SOT23-3]  78.49,124.71 90 top
Q41  20V/4.2A/52mΩ/1.4W  [SOT23-3]  89.28,134.87 180 top
Q42  [SOT363_PHILIPS]  89.28,138.05 0 top
R1  2.2k  [0603]  54.48,36.07 270 top
R2  2.2k  [0603]  56.39,36.07 90 top
R3  100k  [0603]  53.85,25.27 180 top
R4  33k  [0603]  64.01,14.48 180 top
R5  180k  [0603]  60.2,16.38 180 top
R6  100k  [0603]  20.83,32.26 270 top
R7  100k  [0603]  24.64,32.26 270 top
R8  4.7k  [0603]  67.82,13.21 0 top
R9  100k  [0603]  17.02,32.26 270 top
R10  1M  [0603]  22.73,32.26 270 top
R11  1M  [0603]  18.92,32.26 270 top
R12  100k  [0603]  14.48,19.81 0 top
R13  100k  [0603]  14.48,18.16 0 top
R14  1M  [0603]  24.64,36.07 270 top
R15  33k  [0603]  17.02,48.77 90 top
R16  100k  [0603]  18.92,48.77 270 top
R17  100k  [0603]  61.47,20.83 90 top
R18  10  [1206]  14.86,22.99 90 top
R19  10  [1206]  14.86,27.94 270 top
R20  10k  [0603]  67.82,15.11 0 top
R21  4.7k  [0603]  131.83,13.21 0 top
R22  2.2k  [0603]  118.49,36.07 270 top
R23  2.2k  [0603]  120.4,36.07 90 top
R24  100k  [0603]  117.86,25.27 180 top
R25  180k  [0603]  124.21,16.38 180 top
R26  33k  [0603]  128.02,14.48 180 top
R27  100k  [0603]  84.84,32.26 270 top
R28  100k  [0603]  81.03,32.26 270 top
R29  1M  [0603]  86.74,32.26 270 top
R30  1M  [0603]  82.93,32.26 270 top
R31  100k  [0603]  78.49,19.81 0 top
R32  100k  [0603]  78.49,18.16 0 top
R33  100k  [0603]  88.65,32.26 270 top
R34  1M  [0603]  88.65,36.07 270 top
R35  100k  [0603]  82.93,48.77 270 top
R36  33k  [0603]  81.03,48.77 90 top
R37  100k  [0603]  125.48,20.83 90 top
R38  10  [1206]  78.87,27.94 270 top
R39  10  [1206]  78.87,22.99 90 top
R40  10k  [0603]  131.83,15.11 0 top
R41  4.7k  [0603]  67.82,67.69 0 top
R42  2.2k  [0603]  54.48,90.55 270 top
R43  2.2k  [0603]  56.39,90.55 90 top
R44  100k  [0603]  53.85,79.76 180 top
R45  180k  [0603]  60.2,70.87 180 top
R46  33k  [0603]  64.01,68.96 180 top
R47  100k  [0603]  20.83,86.74 270 top
R48  100k  [0603]  17.02,86.74 270 top
R49  1M  [0603]  22.73,86.74 270 top
R50  1M  [0603]  18.92,86.74 270 top
R51  100k  [0603]  14.48,74.3 0 top
R52  100k  [0603]  14.48,72.64 0 top
R53  100k  [0603]  24.64,86.74 270 top
R54  1M  [0603]  24.64,90.55 270 top
R55  100k  [0603]  18.92,103.25 270 top
R56  33k  [0603]  17.02,103.25 90 top
R57  100k  [0603]  61.47,75.31 90 top
R58  10  [1206]  14.86,82.42 270 top
R59  10  [1206]  14.86,77.47 90 top
R60  10k  [0603]  67.82,69.6 0 top
R61  4.7k  [0603]  131.83,67.69 0 top
R62  2.2k  [0603]  118.49,90.55 270 top
R63  2.2k  [0603]  120.4,90.55 90 top
R64  100k  [0603]  117.86,79.76 180 top
R65  180k  [0603]  124.21,70.87 180 top
R66  33k  [0603]  128.02,68.96 180 top
R67  100k  [0603]  84.84,86.74 270 top
R68  100k  [0603]  81.03,86.74 270 top
R69  1M  [0603]  86.74,86.74 270 top
R70  1M  [0603]  82.93,86.74 270 top
R71  100k  [0603]  78.49,74.3 0 top
R72  100k  [0603]  78.49,72.64 0 top
R73  100k  [0603]  88.65,86.74 270 top
R74  1M  [0603]  88.65,90.55 270 top
R75  100k  [0603]  82.93,103.25 270 top
R76  33k  [0603]  81.03,103.25 90 top
R77  100k  [0603]  125.48,75.31 90 top
R78  10  [1206]  78.87,82.42 270 top
R79  10  [1206]  78.87,77.47 90 top
R80  10k  [0603]  131.83,69.6 0 top
R81  4.7k  [0603]  67.82,122.17 0 top
R82  2.2k  [0603]  54.48,145.03 270 top
R83  2.2k  [0603]  56.39,145.03 90 top
R84  100k  [0603]  53.85,134.24 180 top
R85  180k  [0603]  60.2,125.35 180 top
R86  33k  [0603]  64.01,123.44 180 top
R87  100k  [0603]  20.83,141.22 270 top
R88  100k  [0603]  17.02,141.22 270 top
R89  1M  [0603]  22.73,141.22 270 top
R90  1M  [0603]  18.92,141.22 270 top
R91  100k  [0603]  14.48,128.78 0 top
R92  100k  [0603]  14.48,127.13 0 top
R93  100k  [0603]  24.64,141.22 270 top
R94  1M  [0603]  24.64,145.03 270 top
R95  100k  [0603]  18.92,157.73 270 top
R96  33k  [0603]  17.02,157.73 90 top
R97  100k  [0603]  61.47,129.79 90 top
R98  10  [1206]  14.86,136.91 270 top
R99  10  [1206]  14.86,131.95 90 top
R100  10k  [0603]  67.82,124.08 0 top
R101  4.7k  [0603]  131.83,122.17 0 top
R102  2.2k  [0603]  118.49,145.03 270 top
R103  2.2k  [0603]  120.4,145.03 90 top
R104  100k  [0603]  117.86,134.24 180 top
R105  180k  [0603]  124.21,125.35 180 top
R106  33k  [0603]  128.02,123.44 180 top
R107  100k  [0603]  84.84,141.22 270 top
R108  100k  [0603]  81.03,141.22 270 top
R109  1M  [0603]  86.74,141.22 270 top
R110  1M  [0603]  82.93,141.22 270 top
R111  100k  [0603]  78.49,128.78 0 top
R112  100k  [0603]  78.49,127.13 0 top
R113  100k  [0603]  88.65,141.22 270 top
R114  1M  [0603]  88.65,145.03 270 top
R115  100k  [0603]  82.93,157.73 270 top
R116  33k  [0603]  81.03,157.73 90 top
R117  100k  [0603]  125.48,129.79 90 top
R118  10  [1206]  78.87,136.91 270 top
R119  10  [1206]  78.87,131.95 90 top
R120  10k  [0603]  131.83,124.08 0 top
RESET  MOMENTARY-SWITCH-SPST-SMD-4.6X2.8MM  [TACTILE_SWITCH_SMD_4.6X2.8MM]  18.92,35.43 0 top
RESET1  MOMENTARY-SWITCH-SPST-SMD-4.6X2.8MM  [TACTILE_SWITCH_SMD_4.6X2.8MM]  82.93,35.43 0 top
RESET2  MOMENTARY-SWITCH-SPST-SMD-4.6X2.8MM  [TACTILE_SWITCH_SMD_4.6X2.8MM]  18.92,89.92 0 top
RESET3  MOMENTARY-SWITCH-SPST-SMD-4.6X2.8MM  [TACTILE_SWITCH_SMD_4.6X2.8MM]  82.93,89.92 0 top
RESET4  MOMENTARY-SWITCH-SPST-SMD-4.6X2.8MM  [TACTILE_SWITCH_SMD_4.6X2.8MM]  18.92,144.4 0 top
RESET5  MOMENTARY-SWITCH-SPST-SMD-4.6X2.8MM  [TACTILE_SWITCH_SMD_4.6X2.8MM]  82.93,144.4 0 top
S1  [SWITCH_SPST_SMD_A]  10.03,17.02 90 top
S2  [SWITCH_SPST_SMD_A]  74.04,17.02 90 top
S3  [SWITCH_SPST_SMD_A]  10.03,71.5 90 top
S4  [SWITCH_SPST_SMD_A]  74.04,71.5 90 top
S5  [SWITCH_SPST_SMD_A]  10.03,125.98 90 top
S6  [SWITCH_SPST_SMD_A]  74.04,125.98 90 top
SYS_PWR  JUMPER-SMT_2_NC_TRACE_SILK  [SMT-JUMPER_2_NC_TRACE_SILK]  67.18,17.65 0 bottom
SYS_PWR1  JUMPER-SMT_2_NC_TRACE_SILK  [SMT-JUMPER_2_NC_TRACE_SILK]  131.19,17.65 0 bottom
SYS_PWR2  JUMPER-SMT_2_NC_TRACE_SILK  [SMT-JUMPER_2_NC_TRACE_SILK]  67.18,72.14 0 bottom
SYS_PWR3  JUMPER-SMT_2_NC_TRACE_SILK  [SMT-JUMPER_2_NC_TRACE_SILK]  131.19,72.14 0 bottom
SYS_PWR4  JUMPER-SMT_2_NC_TRACE_SILK  [SMT-JUMPER_2_NC_TRACE_SILK]  67.18,126.62 0 bottom
SYS_PWR5  JUMPER-SMT_2_NC_TRACE_SILK  [SMT-JUMPER_2_NC_TRACE_SILK]  131.19,126.62 0 bottom
TP1  TEST-POINT3X5  [PAD.03X.05]  13.21,34.8 0 bottom
TP2  TEST-POINT3X5  [PAD.03X.05]  10.67,33.53 0 bottom
TP3  TEST-POINT3X5  [PAD.03X.05]  25.91,37.97 0 bottom
TP4  TEST-POINT3X5  [PAD.03X.05]  28.45,37.34 0 bottom
TP5  TEST-POINT3X5  [PAD.03X.05]  10.67,44.96 0 bottom
TP6  TEST-POINT3X5  [PAD.03X.05]  13.21,43.69 0 bottom
TP7  TEST-POINT3X5  [PAD.03X.05]  46.23,30.35 0 bottom
TP8  TEST-POINT3X5  [PAD.03X.05]  46.23,32.89 0 bottom
TP9  TEST-POINT3X5  [PAD.03X.05]  66.55,34.8 0 bottom
TP10  TEST-POINT3X5  [PAD.03X.05]  64.01,36.07 0 bottom
TP11  TEST-POINT3X5  [PAD.03X.05]  46.23,43.05 0 bottom
TP12  TEST-POINT3X5  [PAD.03X.05]  46.23,45.59 0 bottom
TP13  TEST-POINT3X5  [PAD.03X.05]  64.01,44.96 0 bottom
TP14  TEST-POINT3X5  [PAD.03X.05]  66.55,46.23 0 bottom
TP15  TEST-POINT3X5  [PAD.03X.05]  50.67,53.85 0 bottom
TP16  TEST-POINT3X5  [PAD.03X.05]  50.67,57.02 0 bottom
TP17  TEST-POINT3X5  [PAD.03X.05]  54.48,55.12 0 bottom
TP18  TEST-POINT3X5  [PAD.03X.05]  55.75,52.58 0 bottom
TP19  TEST-POINT3X5  [PAD.03X.05]  61.47,55.12 0 bottom
TP20  TEST-POINT3X5  [PAD.03X.05]  62.74,52.58 0 bottom
TP21  TEST-POINT3X5  [PAD.03X.05]  22.73,52.58 0 bottom
TP22  TEST-POINT3X5  [PAD.03X.05]  15.75,52.58 0 bottom
TP23  TEST-POINT3X5  [PAD.03X.05]  17.02,55.12 0 bottom
TP24  TEST-POINT3X5  [PAD.03X.05]  24,55.12 0 bottom
TP25  TEST-POINT3X5  [PAD.03X.05]  11.94,38.61 0 bottom
TP26  TEST-POINT3X5  [PAD.03X.05]  14.48,38.61 0 bottom
TP27  TEST-POINT3X5  [PAD.03X.05]  14.48,41.15 0 bottom
TP28  TEST-POINT3X5  [PAD.03X.05]  11.94,41.15 0 bottom
TP29  TEST-POINT3X5  [PAD.03X.05]  62.74,38.61 0 bottom
TP30  TEST-POINT3X5  [PAD.03X.05]  65.28,41.15 0 bottom
TP31  TEST-POINT3X5  [PAD.03X.05]  65.28,38.61 0 bottom
TP32  TEST-POINT3X5  [PAD.03X.05]  62.74,41.15 0 bottom
TP33  TEST-POINT3X5  [PAD.03X.05]  13.21,32.26 0 bottom
TP34  TEST-POINT3X5  [PAD.03X.05]  15.75,20.83 0 bottom
TP35  TEST-POINT3X5  [PAD.03X.05]  65.28,13.21 0 bottom
TP36  TEST-POINT3X5  [PAD.03X.05]  62.74,13.21 0 bottom
TP37  TEST-POINT3X5  [PAD.03X.05]  57.66,23.37 0 bottom
TP38  TEST-POINT3X5  [PAD.03X.05]  51.94,26.54 0 bottom
TP39  TEST-POINT3X5  [PAD.03X.05]  57.66,29.72 0 bottom
TP40  TEST-POINT3X5  [PAD.03X.05]  77.22,34.8 0 bottom
TP41  TEST-POINT3X5  [PAD.03X.05]  74.68,33.53 0 bottom
TP42  TEST-POINT3X5  [PAD.03X.05]  89.92,37.97 0 bottom
TP43  TEST-POINT3X5  [PAD.03X.05]  92.46,37.34 0 bottom
TP44  TEST-POINT3X5  [PAD.03X.05]  74.68,44.96 0 bottom
TP45  TEST-POINT3X5  [PAD.03X.05]  77.22,43.69 0 bottom
TP46  TEST-POINT3X5  [PAD.03X.05]  110.24,30.35 0 bottom
TP47  TEST-POINT3X5  [PAD.03X.05]  110.24,32.89 0 bottom
TP48  TEST-POINT3X5  [PAD.03X.05]  130.56,34.8 0 bottom
TP49  TEST-POINT3X5  [PAD.03X.05]  128.02,36.07 0 bottom
TP50  TEST-POINT3X5  [PAD.03X.05]  110.24,43.05 0 bottom
TP51  TEST-POINT3X5  [PAD.03X.05]  110.24,45.59 0 bottom
TP52  TEST-POINT3X5  [PAD.03X.05]  128.02,44.96 0 bottom
TP53  TEST-POINT3X5  [PAD.03X.05]  130.56,46.23 0 bottom
TP54  TEST-POINT3X5  [PAD.03X.05]  114.68,53.85 0 bottom
TP55  TEST-POINT3X5  [PAD.03X.05]  114.68,57.02 0 bottom
TP56  TEST-POINT3X5  [PAD.03X.05]  118.49,55.12 0 bottom
TP57  TEST-POINT3X5  [PAD.03X.05]  119.76,52.58 0 bottom
TP58  TEST-POINT3X5  [PAD.03X.05]  125.48,55.12 0 bottom
TP59  TEST-POINT3X5  [PAD.03X.05]  126.75,52.58 0 bottom
TP60  TEST-POINT3X5  [PAD.03X.05]  86.74,52.58 0 bottom
TP61  TEST-POINT3X5  [PAD.03X.05]  79.76,52.58 0 bottom
TP62  TEST-POINT3X5  [PAD.03X.05]  81.03,55.12 0 bottom
TP63  TEST-POINT3X5  [PAD.03X.05]  88.01,55.12 0 bottom
TP64  TEST-POINT3X5  [PAD.03X.05]  75.95,38.61 0 bottom
TP65  TEST-POINT3X5  [PAD.03X.05]  78.49,38.61 0 bottom
TP66  TEST-POINT3X5  [PAD.03X.05]  78.49,41.15 0 bottom
TP67  TEST-POINT3X5  [PAD.03X.05]  75.95,41.15 0 bottom
TP68  TEST-POINT3X5  [PAD.03X.05]  126.75,38.61 0 bottom
TP69  TEST-POINT3X5  [PAD.03X.05]  129.29,41.15 0 bottom
TP70  TEST-POINT3X5  [PAD.03X.05]  129.29,38.61 0 bottom
TP71  TEST-POINT3X5  [PAD.03X.05]  126.75,41.15 0 bottom
TP72  TEST-POINT3X5  [PAD.03X.05]  77.22,32.26 0 bottom
TP73  TEST-POINT3X5  [PAD.03X.05]  129.29,13.21 0 bottom
TP74  TEST-POINT3X5  [PAD.03X.05]  126.75,13.21 0 bottom
TP75  TEST-POINT3X5  [PAD.03X.05]  121.67,23.37 0 bottom
TP76  TEST-POINT3X5  [PAD.03X.05]  79.76,20.83 0 bottom
TP77  TEST-POINT3X5  [PAD.03X.05]  121.67,29.72 0 bottom
TP78  TEST-POINT3X5  [PAD.03X.05]  115.95,26.54 0 bottom
TP79  TEST-POINT3X5  [PAD.03X.05]  13.21,89.28 0 bottom
TP80  TEST-POINT3X5  [PAD.03X.05]  10.67,88.01 0 bottom
TP81  TEST-POINT3X5  [PAD.03X.05]  25.91,92.46 0 bottom
TP82  TEST-POINT3X5  [PAD.03X.05]  28.45,91.82 0 bottom
TP83  TEST-POINT3X5  [PAD.03X.05]  10.67,99.44 0 bottom
TP84  TEST-POINT3X5  [PAD.03X.05]  13.21,98.17 0 bottom
TP85  TEST-POINT3X5  [PAD.03X.05]  46.23,84.84 0 bottom
TP86  TEST-POINT3X5  [PAD.03X.05]  46.23,87.38 0 bottom
TP87  TEST-POINT3X5  [PAD.03X.05]  66.55,89.28 0 bottom
TP88  TEST-POINT3X5  [PAD.03X.05]  64.01,90.55 0 bottom
TP89  TEST-POINT3X5  [PAD.03X.05]  46.23,97.54 0 bottom
TP90  TEST-POINT3X5  [PAD.03X.05]  46.23,100.08 0 bottom
TP91  TEST-POINT3X5  [PAD.03X.05]  64.01,99.44 0 bottom
TP92  TEST-POINT3X5  [PAD.03X.05]  66.55,100.71 0 bottom
TP93  TEST-POINT3X5  [PAD.03X.05]  50.67,108.33 0 bottom
TP94  TEST-POINT3X5  [PAD.03X.05]  50.67,111.51 0 bottom
TP95  TEST-POINT3X5  [PAD.03X.05]  54.48,109.6 0 bottom
TP96  TEST-POINT3X5  [PAD.03X.05]  55.75,107.06 0 bottom
TP97  TEST-POINT3X5  [PAD.03X.05]  61.47,109.6 0 bottom
TP98  TEST-POINT3X5  [PAD.03X.05]  62.74,107.06 0 bottom
TP99  TEST-POINT3X5  [PAD.03X.05]  22.73,107.06 0 bottom
TP100  TEST-POINT3X5  [PAD.03X.05]  15.75,107.06 0 bottom
TP101  TEST-POINT3X5  [PAD.03X.05]  17.02,109.6 0 bottom
TP102  TEST-POINT3X5  [PAD.03X.05]  24,109.6 0 bottom
TP103  TEST-POINT3X5  [PAD.03X.05]  11.94,93.09 0 bottom
TP104  TEST-POINT3X5  [PAD.03X.05]  14.48,93.09 0 bottom
TP105  TEST-POINT3X5  [PAD.03X.05]  14.48,95.63 0 bottom
TP106  TEST-POINT3X5  [PAD.03X.05]  11.94,95.63 0 bottom
TP107  TEST-POINT3X5  [PAD.03X.05]  62.74,93.09 0 bottom
TP108  TEST-POINT3X5  [PAD.03X.05]  65.28,95.63 0 bottom
TP109  TEST-POINT3X5  [PAD.03X.05]  65.28,93.09 0 bottom
TP110  TEST-POINT3X5  [PAD.03X.05]  62.74,95.63 0 bottom
TP111  TEST-POINT3X5  [PAD.03X.05]  13.21,86.74 0 bottom
TP112  TEST-POINT3X5  [PAD.03X.05]  65.28,67.69 0 bottom
TP113  TEST-POINT3X5  [PAD.03X.05]  62.74,67.69 0 bottom
TP114  TEST-POINT3X5  [PAD.03X.05]  57.66,77.85 0 bottom
TP115  TEST-POINT3X5  [PAD.03X.05]  15.75,75.31 0 bottom
TP116  TEST-POINT3X5  [PAD.03X.05]  57.66,84.2 0 bottom
TP117  TEST-POINT3X5  [PAD.03X.05]  51.94,81.03 0 bottom
TP118  TEST-POINT3X5  [PAD.03X.05]  77.22,89.28 0 bottom
TP119  TEST-POINT3X5  [PAD.03X.05]  74.68,88.01 0 bottom
TP120  TEST-POINT3X5  [PAD.03X.05]  89.92,92.46 0 bottom
TP121  TEST-POINT3X5  [PAD.03X.05]  92.46,91.82 0 bottom
TP122  TEST-POINT3X5  [PAD.03X.05]  74.68,99.44 0 bottom
TP123  TEST-POINT3X5  [PAD.03X.05]  77.22,98.17 0 bottom
TP124  TEST-POINT3X5  [PAD.03X.05]  110.24,84.84 0 bottom
TP125  TEST-POINT3X5  [PAD.03X.05]  110.24,87.38 0 bottom
TP126  TEST-POINT3X5  [PAD.03X.05]  130.56,89.28 0 bottom
TP127  TEST-POINT3X5  [PAD.03X.05]  128.02,90.55 0 bottom
TP128  TEST-POINT3X5  [PAD.03X.05]  110.24,97.54 0 bottom
TP129  TEST-POINT3X5  [PAD.03X.05]  110.24,100.08 0 bottom
TP130  TEST-POINT3X5  [PAD.03X.05]  128.02,99.44 0 bottom
TP131  TEST-POINT3X5  [PAD.03X.05]  130.56,100.71 0 bottom
TP132  TEST-POINT3X5  [PAD.03X.05]  114.68,108.33 0 bottom
TP133  TEST-POINT3X5  [PAD.03X.05]  114.68,111.51 0 bottom
TP134  TEST-POINT3X5  [PAD.03X.05]  118.49,109.6 0 bottom
TP135  TEST-POINT3X5  [PAD.03X.05]  119.76,107.06 0 bottom
TP136  TEST-POINT3X5  [PAD.03X.05]  125.48,109.6 0 bottom
TP137  TEST-POINT3X5  [PAD.03X.05]  126.75,107.06 0 bottom
TP138  TEST-POINT3X5  [PAD.03X.05]  86.74,107.06 0 bottom
TP139  TEST-POINT3X5  [PAD.03X.05]  79.76,107.06 0 bottom
TP140  TEST-POINT3X5  [PAD.03X.05]  81.03,109.6 0 bottom
TP141  TEST-POINT3X5  [PAD.03X.05]  88.01,109.6 0 bottom
TP142  TEST-POINT3X5  [PAD.03X.05]  75.95,93.09 0 bottom
TP143  TEST-POINT3X5  [PAD.03X.05]  78.49,93.09 0 bottom
TP144  TEST-POINT3X5  [PAD.03X.05]  78.49,95.63 0 bottom
TP145  TEST-POINT3X5  [PAD.03X.05]  75.95,95.63 0 bottom
TP146  TEST-POINT3X5  [PAD.03X.05]  126.75,93.09 0 bottom
TP147  TEST-POINT3X5  [PAD.03X.05]  129.29,95.63 0 bottom
TP148  TEST-POINT3X5  [PAD.03X.05]  129.29,93.09 0 bottom
TP149  TEST-POINT3X5  [PAD.03X.05]  126.75,95.63 0 bottom
TP150  TEST-POINT3X5  [PAD.03X.05]  77.22,86.74 0 bottom
TP151  TEST-POINT3X5  [PAD.03X.05]  129.29,67.69 0 bottom
TP152  TEST-POINT3X5  [PAD.03X.05]  126.75,67.69 0 bottom
TP153  TEST-POINT3X5  [PAD.03X.05]  121.67,77.85 0 bottom
TP154  TEST-POINT3X5  [PAD.03X.05]  79.76,75.31 0 bottom
TP155  TEST-POINT3X5  [PAD.03X.05]  121.67,84.2 0 bottom
TP156  TEST-POINT3X5  [PAD.03X.05]  115.95,81.03 0 bottom
TP157  TEST-POINT3X5  [PAD.03X.05]  13.21,143.76 0 bottom
TP158  TEST-POINT3X5  [PAD.03X.05]  10.67,142.49 0 bottom
TP159  TEST-POINT3X5  [PAD.03X.05]  25.91,146.94 0 bottom
TP160  TEST-POINT3X5  [PAD.03X.05]  28.45,146.3 0 bottom
TP161  TEST-POINT3X5  [PAD.03X.05]  10.67,153.92 0 bottom
TP162  TEST-POINT3X5  [PAD.03X.05]  13.21,152.65 0 bottom
TP163  TEST-POINT3X5  [PAD.03X.05]  46.23,139.32 0 bottom
TP164  TEST-POINT3X5  [PAD.03X.05]  46.23,141.86 0 bottom
TP165  TEST-POINT3X5  [PAD.03X.05]  66.55,143.76 0 bottom
TP166  TEST-POINT3X5  [PAD.03X.05]  64.01,145.03 0 bottom
TP167  TEST-POINT3X5  [PAD.03X.05]  46.23,152.02 0 bottom
TP168  TEST-POINT3X5  [PAD.03X.05]  46.23,154.56 0 bottom
TP169  TEST-POINT3X5  [PAD.03X.05]  64.01,153.92 0 bottom
TP170  TEST-POINT3X5  [PAD.03X.05]  66.55,155.19 0 bottom
TP171  TEST-POINT3X5  [PAD.03X.05]  50.67,162.81 0 bottom
TP172  TEST-POINT3X5  [PAD.03X.05]  50.67,165.99 0 bottom
TP173  TEST-POINT3X5  [PAD.03X.05]  54.48,164.08 0 bottom
TP174  TEST-POINT3X5  [PAD.03X.05]  55.75,161.54 0 bottom
TP175  TEST-POINT3X5  [PAD.03X.05]  61.47,164.08 0 bottom
TP176  TEST-POINT3X5  [PAD.03X.05]  62.74,161.54 0 bottom
TP177  TEST-POINT3X5  [PAD.03X.05]  22.73,161.54 0 bottom
TP178  TEST-POINT3X5  [PAD.03X.05]  15.75,161.54 0 bottom
TP179  TEST-POINT3X5  [PAD.03X.05]  17.02,164.08 0 bottom
TP180  TEST-POINT3X5  [PAD.03X.05]  24,164.08 0 bottom
TP181  TEST-POINT3X5  [PAD.03X.05]  11.94,147.57 0 bottom
TP182  TEST-POINT3X5  [PAD.03X.05]  14.48,147.57 0 bottom
TP183  TEST-POINT3X5  [PAD.03X.05]  14.48,150.11 0 bottom
TP184  TEST-POINT3X5  [PAD.03X.05]  11.94,150.11 0 bottom
TP185  TEST-POINT3X5  [PAD.03X.05]  62.74,147.57 0 bottom
TP186  TEST-POINT3X5  [PAD.03X.05]  65.28,150.11 0 bottom
TP187  TEST-POINT3X5  [PAD.03X.05]  65.28,147.57 0 bottom
TP188  TEST-POINT3X5  [PAD.03X.05]  62.74,150.11 0 bottom
TP189  TEST-POINT3X5  [PAD.03X.05]  13.21,141.22 0 bottom
TP190  TEST-POINT3X5  [PAD.03X.05]  65.28,122.17 0 bottom
TP191  TEST-POINT3X5  [PAD.03X.05]  62.74,122.17 0 bottom
TP192  TEST-POINT3X5  [PAD.03X.05]  57.66,132.33 0 bottom
TP193  TEST-POINT3X5  [PAD.03X.05]  15.75,129.79 0 bottom
TP194  TEST-POINT3X5  [PAD.03X.05]  57.66,138.68 0 bottom
TP195  TEST-POINT3X5  [PAD.03X.05]  51.94,135.51 0 bottom
TP196  TEST-POINT3X5  [PAD.03X.05]  77.22,143.76 0 bottom
TP197  TEST-POINT3X5  [PAD.03X.05]  74.68,142.49 0 bottom
TP198  TEST-POINT3X5  [PAD.03X.05]  89.92,146.94 0 bottom
TP199  TEST-POINT3X5  [PAD.03X.05]  92.46,146.3 0 bottom
TP200  TEST-POINT3X5  [PAD.03X.05]  74.68,153.92 0 bottom
TP201  TEST-POINT3X5  [PAD.03X.05]  77.22,152.65 0 bottom
TP202  TEST-POINT3X5  [PAD.03X.05]  110.24,139.32 0 bottom
TP203  TEST-POINT3X5  [PAD.03X.05]  110.24,141.86 0 bottom
TP204  TEST-POINT3X5  [PAD.03X.05]  130.56,143.76 0 bottom
TP205  TEST-POINT3X5  [PAD.03X.05]  128.02,145.03 0 bottom
TP206  TEST-POINT3X5  [PAD.03X.05]  110.24,152.02 0 bottom
TP207  TEST-POINT3X5  [PAD.03X.05]  110.24,154.56 0 bottom
TP208  TEST-POINT3X5  [PAD.03X.05]  128.02,153.92 0 bottom
TP209  TEST-POINT3X5  [PAD.03X.05]  130.56,155.19 0 bottom
TP210  TEST-POINT3X5  [PAD.03X.05]  114.68,162.81 0 bottom
TP211  TEST-POINT3X5  [PAD.03X.05]  114.68,165.99 0 bottom
TP212  TEST-POINT3X5  [PAD.03X.05]  118.49,164.08 0 bottom
TP213  TEST-POINT3X5  [PAD.03X.05]  119.76,161.54 0 bottom
TP214  TEST-POINT3X5  [PAD.03X.05]  125.48,164.08 0 bottom
TP215  TEST-POINT3X5  [PAD.03X.05]  126.75,161.54 0 bottom
TP216  TEST-POINT3X5  [PAD.03X.05]  86.74,161.54 0 bottom
TP217  TEST-POINT3X5  [PAD.03X.05]  79.76,161.54 0 bottom
TP218  TEST-POINT3X5  [PAD.03X.05]  81.03,164.08 0 bottom
TP219  TEST-POINT3X5  [PAD.03X.05]  88.01,164.08 0 bottom
TP220  TEST-POINT3X5  [PAD.03X.05]  75.95,147.57 0 bottom
TP221  TEST-POINT3X5  [PAD.03X.05]  78.49,147.57 0 bottom
TP222  TEST-POINT3X5  [PAD.03X.05]  78.49,150.11 0 bottom
TP223  TEST-POINT3X5  [PAD.03X.05]  75.95,150.11 0 bottom
TP224  TEST-POINT3X5  [PAD.03X.05]  126.75,147.57 0 bottom
TP225  TEST-POINT3X5  [PAD.03X.05]  129.29,150.11 0 bottom
TP226  TEST-POINT3X5  [PAD.03X.05]  129.29,147.57 0 bottom
TP227  TEST-POINT3X5  [PAD.03X.05]  126.75,150.11 0 bottom
TP228  TEST-POINT3X5  [PAD.03X.05]  77.22,141.22 0 bottom
TP229  TEST-POINT3X5  [PAD.03X.05]  129.29,122.17 0 bottom
TP230  TEST-POINT3X5  [PAD.03X.05]  126.75,122.17 0 bottom
TP231  TEST-POINT3X5  [PAD.03X.05]  121.67,132.33 0 bottom
TP232  TEST-POINT3X5  [PAD.03X.05]  79.76,129.79 0 bottom
TP233  TEST-POINT3X5  [PAD.03X.05]  121.67,138.68 0 bottom
TP234  TEST-POINT3X5  [PAD.03X.05]  115.95,135.51 0 bottom
U1  RPI_PICO_W_XRP  [RPI_PICO_W]  38.61,34.16 180 top
U2  AP63357  [V-DFN3020-13]  62.1,11.94 90 top
U3  LSM6DS0X  [LGA14L]  117.86,29.72 0 top
U4  LSM6DS0X  [LGA14L]  53.85,29.72 0 top
U5  DRV8835  [WSON-12]  18.29,39.88 270 top
U6  DRV8835  [WSON-12]  58.93,39.88 90 top
U7  DRV8835  [WSON-12]  82.3,39.88 270 top
U8  DRV8835  [WSON-12]  122.94,39.88 90 top
U9  AP63357  [V-DFN3020-13]  126.11,11.94 90 top
U10  RPI_PICO_W_XRP  [RPI_PICO_W]  102.62,34.16 180 top
U11  LSM6DS0X  [LGA14L]  53.85,84.2 0 top
U12  DRV8835  [WSON-12]  18.29,94.36 270 top
U13  DRV8835  [WSON-12]  58.93,94.36 90 top
U14  AP63357  [V-DFN3020-13]  62.1,66.42 90 top
U15  RPI_PICO_W_XRP  [RPI_PICO_W]  38.61,88.65 180 top
U16  LSM6DS0X  [LGA14L]  117.86,84.2 0 top
U17  DRV8835  [WSON-12]  82.3,94.36 270 top
U18  DRV8835  [WSON-12]  122.94,94.36 90 top
U19  AP63357  [V-DFN3020-13]  126.11,66.42 90 top
U20  RPI_PICO_W_XRP  [RPI_PICO_W]  102.62,88.65 180 top
U21  LSM6DS0X  [LGA14L]  53.85,138.68 0 top
U22  DRV8835  [WSON-12]  18.29,148.84 270 top
U23  DRV8835  [WSON-12]  58.93,148.84 90 top
U24  AP63357  [V-DFN3020-13]  62.1,120.9 90 top
U25  RPI_PICO_W_XRP  [RPI_PICO_W]  38.61,143.13 180 top
U26  LSM6DS0X  [LGA14L]  117.86,138.68 0 top
U27  DRV8835  [WSON-12]  82.3,148.84 270 top
U28  DRV8835  [WSON-12]  122.94,148.84 90 top
U29  AP63357  [V-DFN3020-13]  126.11,120.9 90 top
U30  RPI_PICO_W_XRP  [RPI_PICO_W]  102.62,143.13 180 top
U$1  [#MOTOR_3#0]  15.11,34.8 90 top
U$2  [#SERVO_2#0]  64.39,25.91 270 top
U$3  [#11V_MAX###0]  26.16,11.3 90 top
U$4  [#GND#0]  11.18,32.26 0 top
U$5  [#POWER#0]  20.83,23.37 0 top
U$6  [PWR0]  65.53,18.54 270 top
U$7  [RESET0]  18.92,37.59 0 top
U$8  [#MOTOR_R#0]  62.1,44.96 270 top
U$9  [#MR##0]  66.04,42.42 0 top
U$10  [#MOTOR_L#0]  15.11,44.96 90 top
U$11  [#SERVO_1#0]  12.83,25.91 90 top
U$12  [#MOTOR_4#0]  62.1,34.8 270 top
U$13  [#VIN_MEAS#0]  21.21,47.5 0 bottom
U$14  [#MR##1]  66.04,43.43 0 top
U$15  [#3V3#0]  11.18,35.31 0 top
U$16  [#ML##0]  11.18,47.5 0 top
U$17  [#3V3#4]  66.04,44.45 0 top
U$18  [#M4##0]  66.04,32.26 0 top
U$19  [#M4##5]  66.04,33.27 0 top
U$20  [#IO0#0]  11.18,34.29 0 top
U$21  [#IO1#0]  11.18,33.27 0 top
U$22  [#IO5#0]  11.18,43.43 0 top
U$23  [#IO4#0]  11.18,44.45 0 top
U$24  [#GND#0]  11.18,42.42 0 top
U$25  [#3V3#0]  11.18,45.47 0 top
U$26  [#GND_#0]  8.13,23.37 0 bottom
U$27  [#5V_#0]  8.38,25.91 0 bottom
U$28  [#IO8#0]  66.04,35.31 0 top
U$29  [#IO9#0]  66.04,36.32 0 top
U$30  [#GND#10]  66.04,47.5 0 top
U$31  [#GND#10]  66.04,37.34 0 top
U$32  [#ML##1]  11.18,46.48 0 top
U$33  [#3V3#4]  66.04,34.29 0 top
U$34  [#IO12#0]  66.04,45.47 0 top
U$35  [#IO13#0]  66.04,46.48 0 top
U$36  [#POWER#0]  84.84,23.37 0 top
U$37  [#PH#0]  10.29,50.67 90 top
U$38  [#IO27#0]  17.27,56.01 90 top
U$39  [#IO28#0]  24.89,56.01 90 top
U$40  [#GND#10]  14.22,56.01 90 top
U$41  [#3V3#4]  15.24,56.01 90 top
U$42  [#GND#10]  21.84,56.01 90 top
U$43  [#3V3#4]  22.86,56.01 90 top
U$44  [#IO26#0]  16.26,56.01 90 top
U$45  [#IO22#0]  23.88,56.01 90 top
U$46  [#IO18#0]  54.36,56.01 270 top
U$47  [#IO19#0]  55.37,56.01 270 top
U$48  [#IO20#0]  61.98,56.01 270 top
U$49  [#IO21#0]  62.99,56.01 270 top
U$50  [#GND#0]  59.94,56.01 270 top
U$51  [#3V3#0]  60.96,56.01 270 top
U$52  [#GND#0]  52.32,56.01 270 top
U$53  [#3V3#0]  53.34,56.01 270 top
U$54  [#GND#0]  9.02,23.37 0 top
U$55  [#5V#0]  9.02,25.91 0 top
U$56  [#IO16#0]  9.02,28.45 0 top
U$57  [#GND#10]  68.2,23.37 0 top
U$58  [#IO17#0]  68.2,28.45 0 top
U$59  [#5V#18]  68.2,25.91 0 top
U$60  [#I2C#0]  56.39,31.62 0 bottom
U$61  [#IO16_#0]  8.13,28.45 0 bottom
U$62  [ON0]  7.75,19.68 90 top
U$63  [OFF0]  7.75,14.1 90 top
U$64  [#IMU_ADR#0]  50.42,31.62 0 bottom
U$65  [#EN#0]  11.56,50.67 90 top
U$66  [#MOT_MODE_L#3#0]  20.32,39.88 0 bottom
U$67  [SYS0]  67.95,20.83 0 top
U$68  [IO220]  53.21,20.83 270 top
U$69  [#RANGE#0]  61.47,52.07 0 top
U$70  [#MOT_MODE_R#4#0]  56.9,39.88 0 bottom
U$71  [MOT0]  67.95,16.38 0 top
U$72  [XRP_URL_3MM]  52.32,42.04 270 top
U$73  [#PWR#0]  69.09,16.38 90 bottom
U$74  [#LINE#0]  15.75,51.94 0 top
U$75  [#_GND#0]  69.09,23.37 0 bottom
U$76  [#_5V#0]  68.83,25.91 0 bottom
U$77  [#_IO17#0]  69.09,28.45 0 bottom
U$78  [POLARITY_MARKING_CENTER_POSITIVE#JPG]  12.06,10.03 270 top
U$79  [X0]  58.04,26.42 0 bottom
U$80  [Y0]  62.99,28.57 0 bottom
U$81  [Z0]  60.83,30.35 0 bottom
U$82  [#EXTRA#0]  23.37,51.94 0 top
U$83  [USER0]  59.56,20.83 270 top
U$84  [#USER_BTN#0]  35.05,36.7 0 bottom
U$85  [0X6B0]  46.74,29.21 0 bottom
U$86  [0X6A0]  46.74,27.94 0 bottom
U$87  [OPEN#0]  45.47,27.94 0 bottom
U$88  [X0]  62.36,26.67 0 top
U$89  [Y0]  57.66,29.08 0 top
U$90  [Z0]  62.23,29.59 0 top
U$91  [CLOSED#0]  45.47,29.21 0 bottom
U$92  [XRP_FULL_LOGO]  44.7,13.84 0 bottom
U$93  [#VUSB#0]  21.59,11.3 0 bottom
U$94  [#M3##0]  11.18,37.34 0 top
U$95  [#MOT#0]  66.29,15.11 0 bottom
U$96  [#SYS#0]  66.29,17.65 0 bottom
U$97  [XRP_URL_5MM]  27.43,29.59 0 bottom
U$98  QWIIC_LOGO  [QWIIC_INVERTED]  53.85,52.07 0 top
U$99  [#M3##4]  11.18,36.32 0 top
U$100  [#ML#0]  9.02,54.61 90 top
U$101  [#M3#0]  9.02,52.7 90 top
U$102  [100]  66.93,50.67 270 top
U$103  [110]  65.66,50.67 270 top
U$104  [140]  66.93,52.58 270 top
U$105  [150]  65.66,52.58 270 top
U$106  [#MR#0]  68.2,52.45 270 top
U$107  [#M4#0]  68.2,50.55 270 top
U$108  [20]  10.29,52.58 90 top
U$109  [30]  11.56,52.58 90 top
U$110  [60]  10.29,54.48 90 top
U$111  [70]  11.56,54.48 90 top
U$112  [PWR0]  129.54,18.54 270 top
U$113  [RESET0]  82.93,37.59 0 top
U$114  [MOTOR_IO0]  7.75,53.21 90 top
U$115  [MOTOR_IO0]  69.47,51.94 270 top
U$116  [#EN#0]  65.66,54.48 270 top
U$117  [#PH#0]  66.93,54.48 270 top
U$118  [#GND#0]  75.18,32.26 0 top
U$119  [#3V3#0]  75.18,35.31 0 top
U$120  [#IO0#0]  75.18,34.29 0 top
U$121  [#IO1#0]  75.18,33.27 0 top
U$122  [#IO5#0]  75.18,43.43 0 top
U$123  [#IO4#0]  75.18,44.45 0 top
U$124  [#GND#0]  75.18,42.42 0 top
U$125  [#3V3#0]  75.18,45.47 0 top
U$126  [#IO8#0]  130.05,35.31 0 top
U$127  [#IO9#0]  130.05,36.32 0 top
U$128  [#GND#10]  130.05,47.5 0 top
U$129  [#3V3#4]  130.05,44.45 0 top
U$130  [#GND#10]  130.05,37.34 0 top
U$131  [#3V3#4]  130.05,34.29 0 top
U$132  [#IO12#0]  130.05,45.47 0 top
U$133  [#IO13#0]  130.05,46.48 0 top
U$134  [#IO27#0]  81.28,56.01 90 top
U$135  [#IO28#0]  88.9,56.01 90 top
U$136  [#GND#10]  78.23,56.01 90 top
U$137  [#3V3#4]  79.25,56.01 90 top
U$138  [#GND#10]  85.85,56.01 90 top
U$139  [#3V3#4]  86.87,56.01 90 top
U$140  [#IO26#0]  80.26,56.01 90 top
U$141  [#IO22#0]  87.88,56.01 90 top
U$142  [#IO18#0]  118.36,56.01 270 top
U$143  [#IO19#0]  119.38,56.01 270 top
U$144  [#IO20#0]  125.98,56.01 270 top
U$145  [#IO21#0]  127,56.01 270 top
U$146  [#GND#0]  123.95,56.01 270 top
U$147  [#3V3#0]  124.97,56.01 270 top
U$148  [#GND#0]  116.33,56.01 270 top
U$149  [#3V3#0]  117.35,56.01 270 top
U$150  [#GND#0]  73.03,23.37 0 top
U$151  [#5V#0]  73.03,25.91 0 top
U$152  [#IO16#0]  73.03,28.45 0 top
U$153  [#GND#10]  132.21,23.37 0 top
U$154  [#IO17#0]  132.21,28.45 0 top
U$155  [#5V#18]  132.21,25.91 0 top
U$156  [#I2C#0]  120.4,31.62 0 bottom
U$157  [ON0]  71.76,19.68 90 top
U$158  [OFF0]  71.76,14.1 90 top
U$159  [X0]  126.37,26.67 0 top
U$160  [Y0]  121.67,29.08 0 top
U$161  [Z0]  126.24,29.59 0 top
U$162  [#IMU_ADR#0]  114.43,31.62 0 bottom
U$163  [#LINE#0]  79.76,51.94 0 top
U$164  [#MOTOR_L#0]  79.12,44.96 90 top
U$165  [#MOTOR_3#0]  79.12,34.8 90 top
U$166  [#SERVO_1#0]  76.84,25.91 90 top
U$167  [#MOTOR_R#0]  126.11,44.96 270 top
U$168  [#MOTOR_4#0]  126.11,34.8 270 top
U$169  [#SERVO_2#0]  128.4,25.91 270 top